# Altium PCB CAMtastic1_3.PcbDoc
Units mm, origin at the board's own origin, x right, y up, seen from the top; angles counter-clockwise.
Board outline 43 x 40.1 mm, 4 copper layers (Top Layer, Mid-Layer 1, Mid-Layer 2, Bottom Layer); 70 components, 76 nets, 333 pads, 118 vias.
Unrouted connection lines stored in the file: 8.
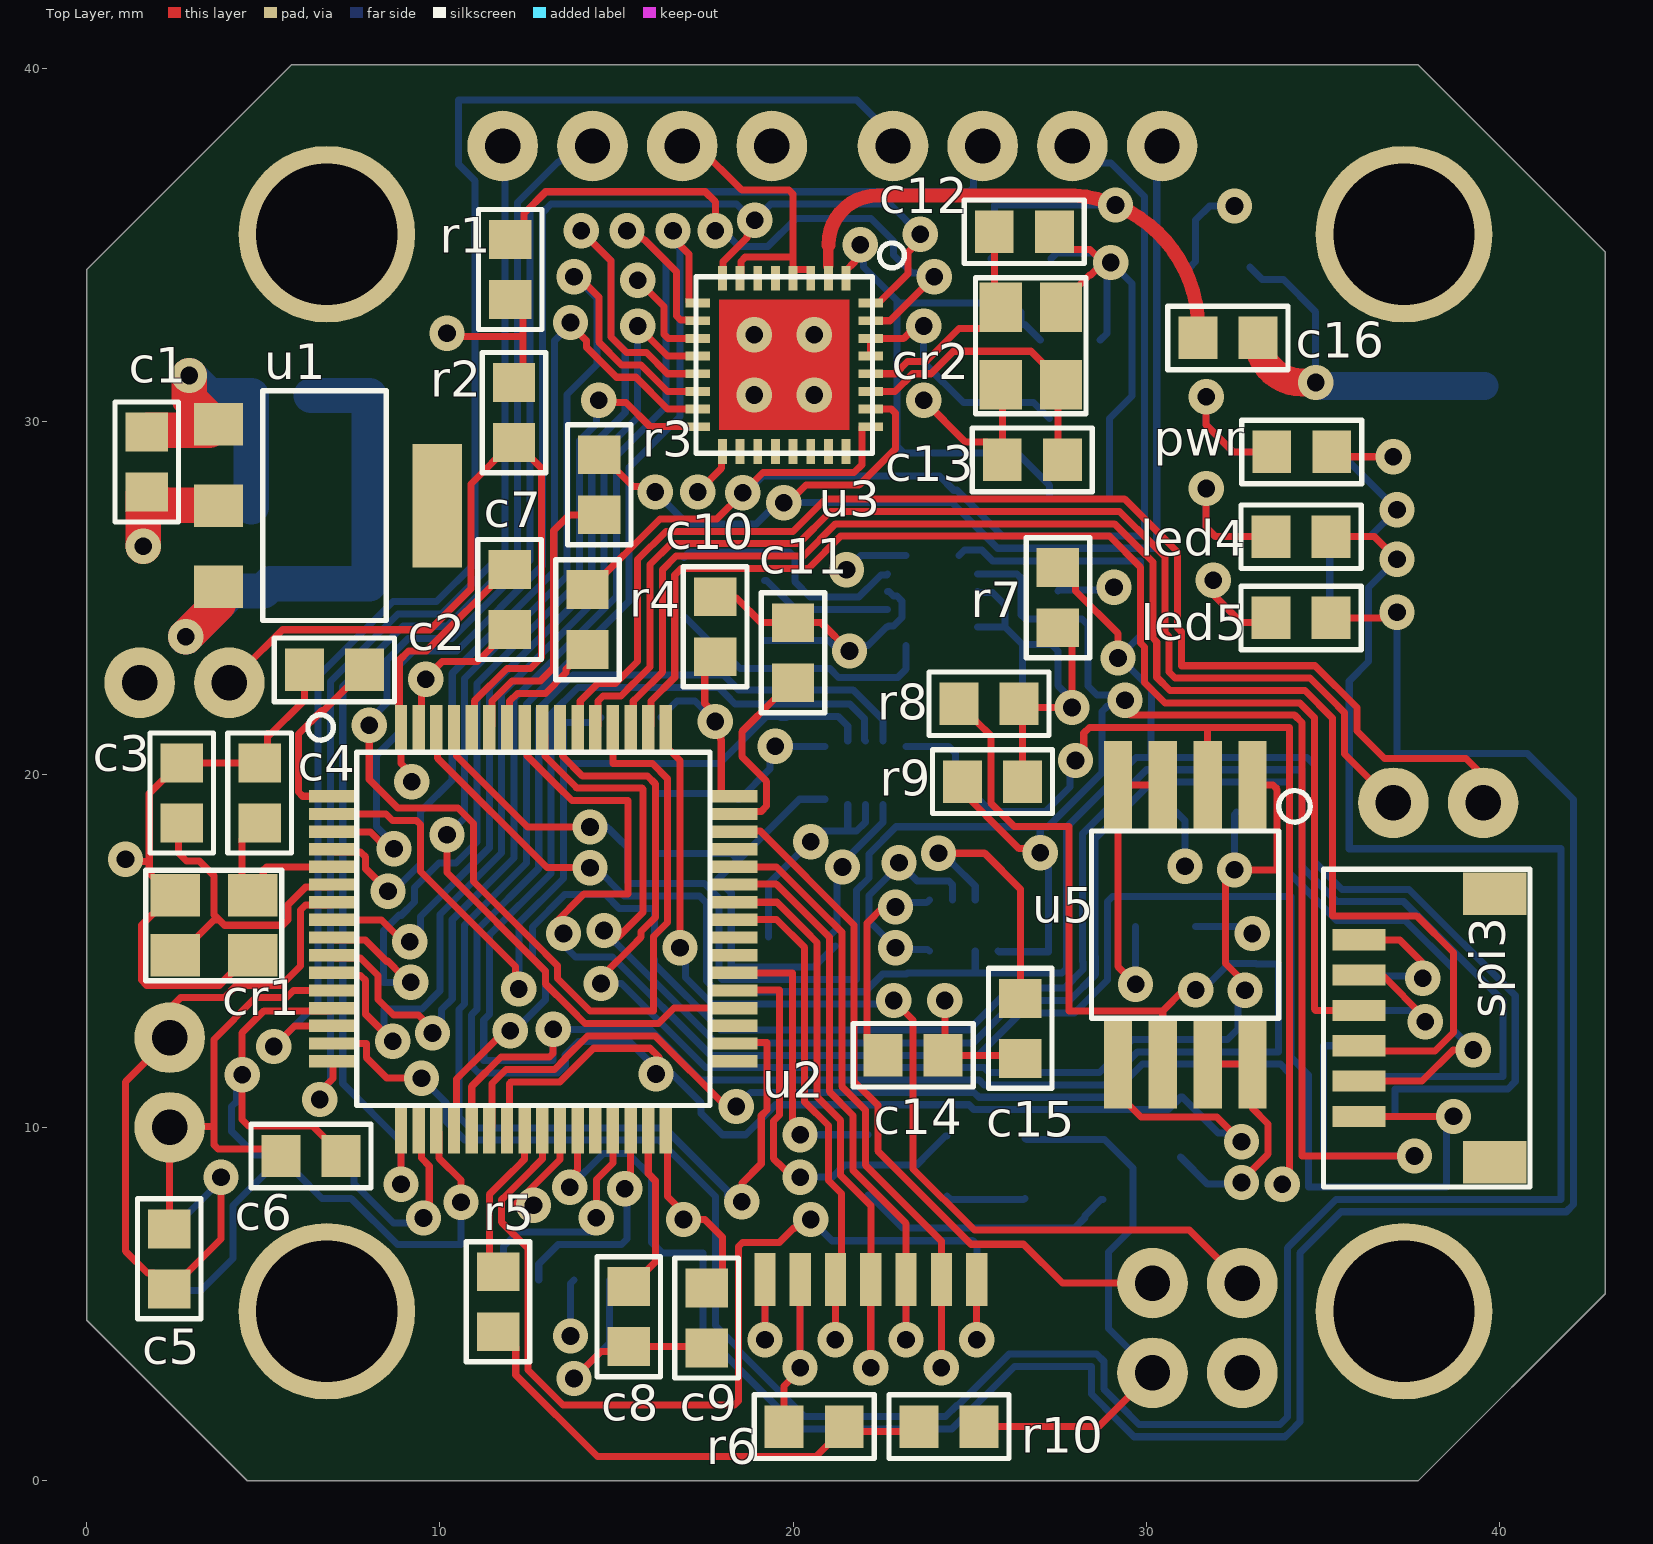
[diagram p0: Top Layer view]
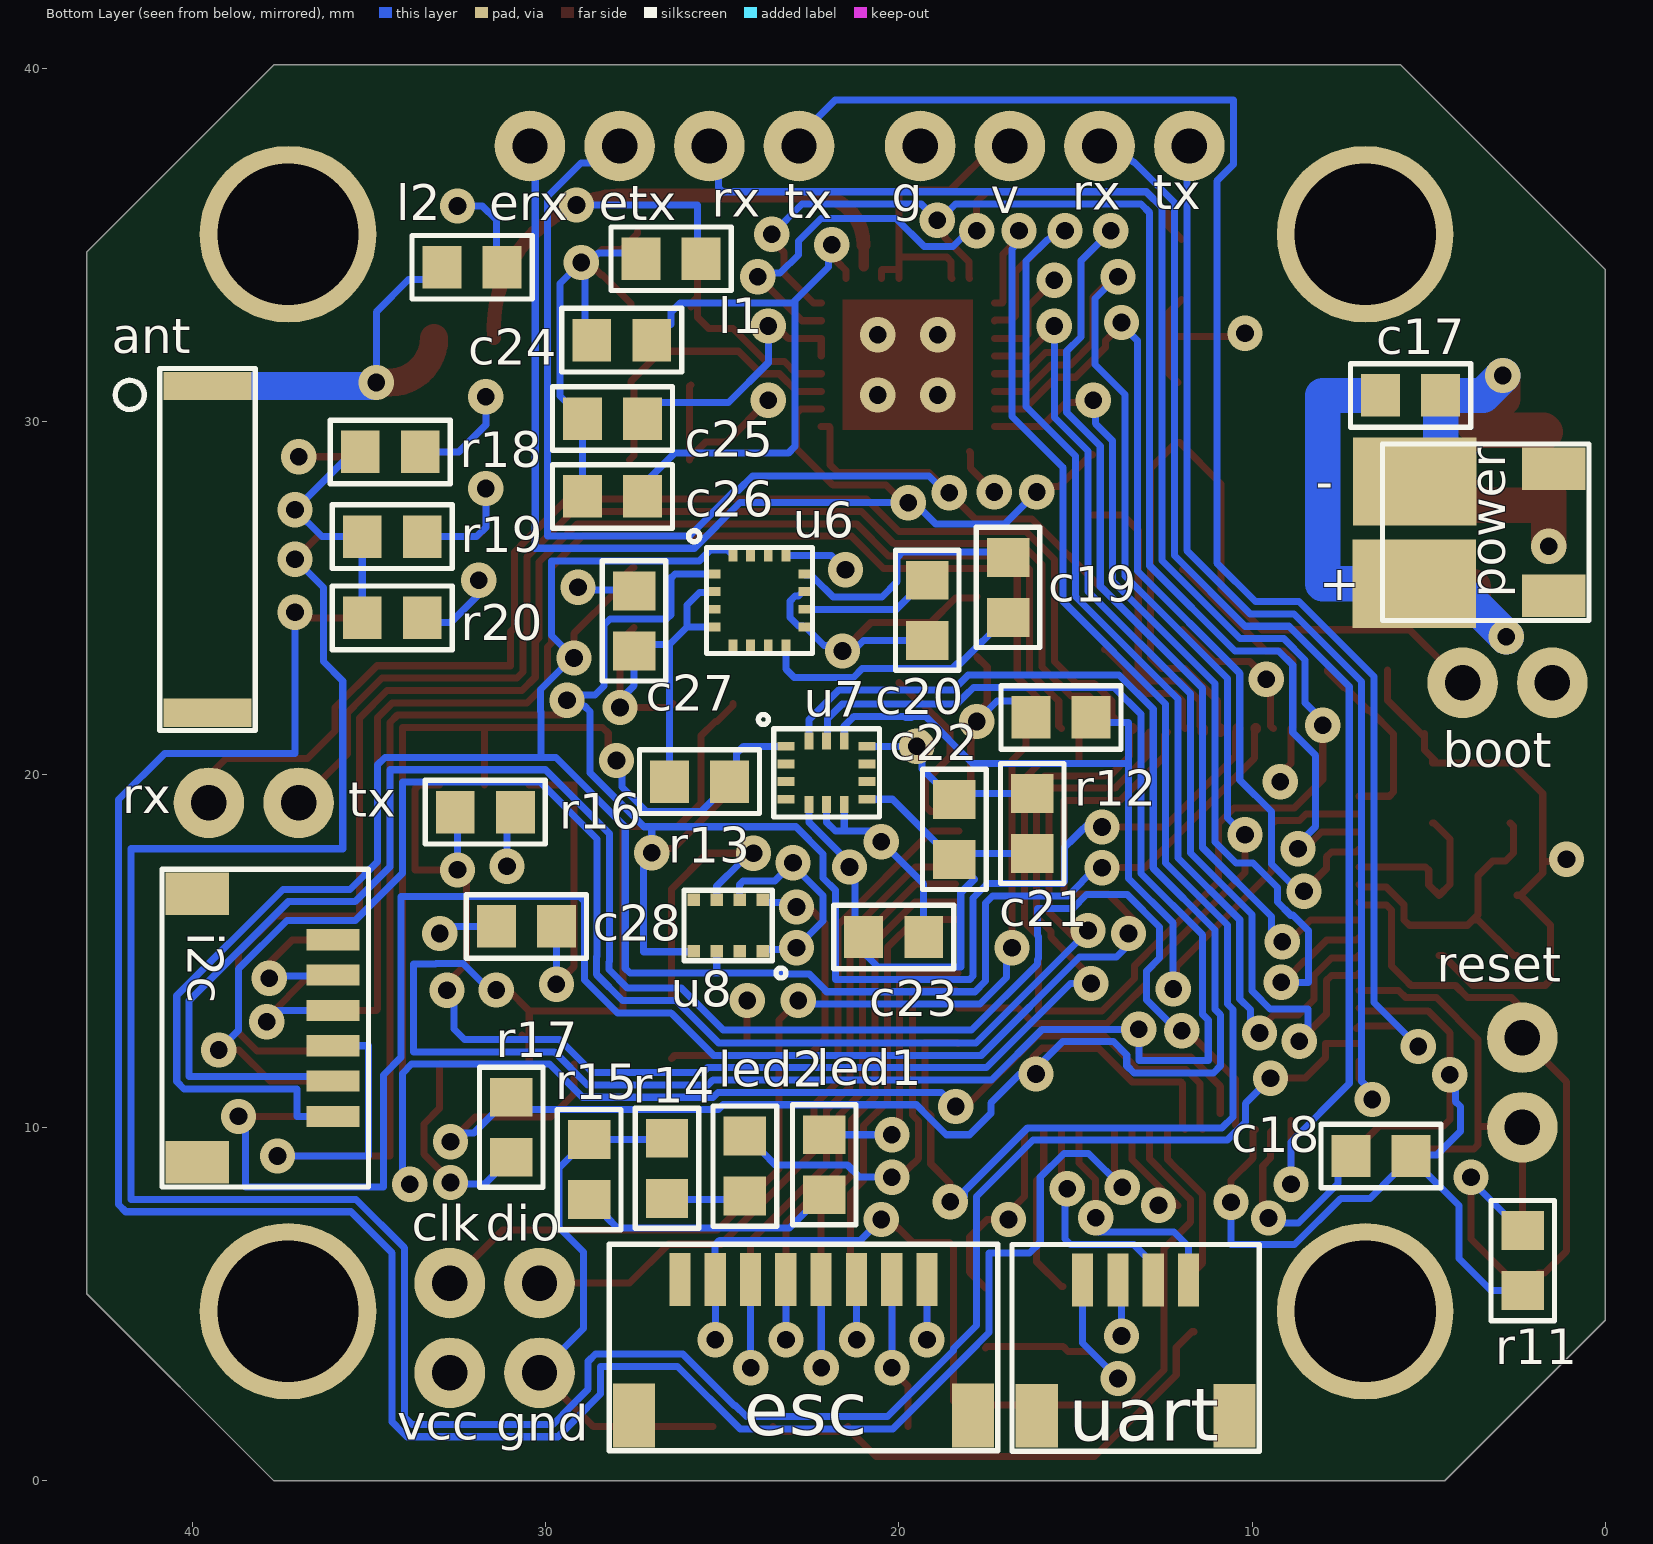
[diagram p1: Bottom Layer view, seen from below]
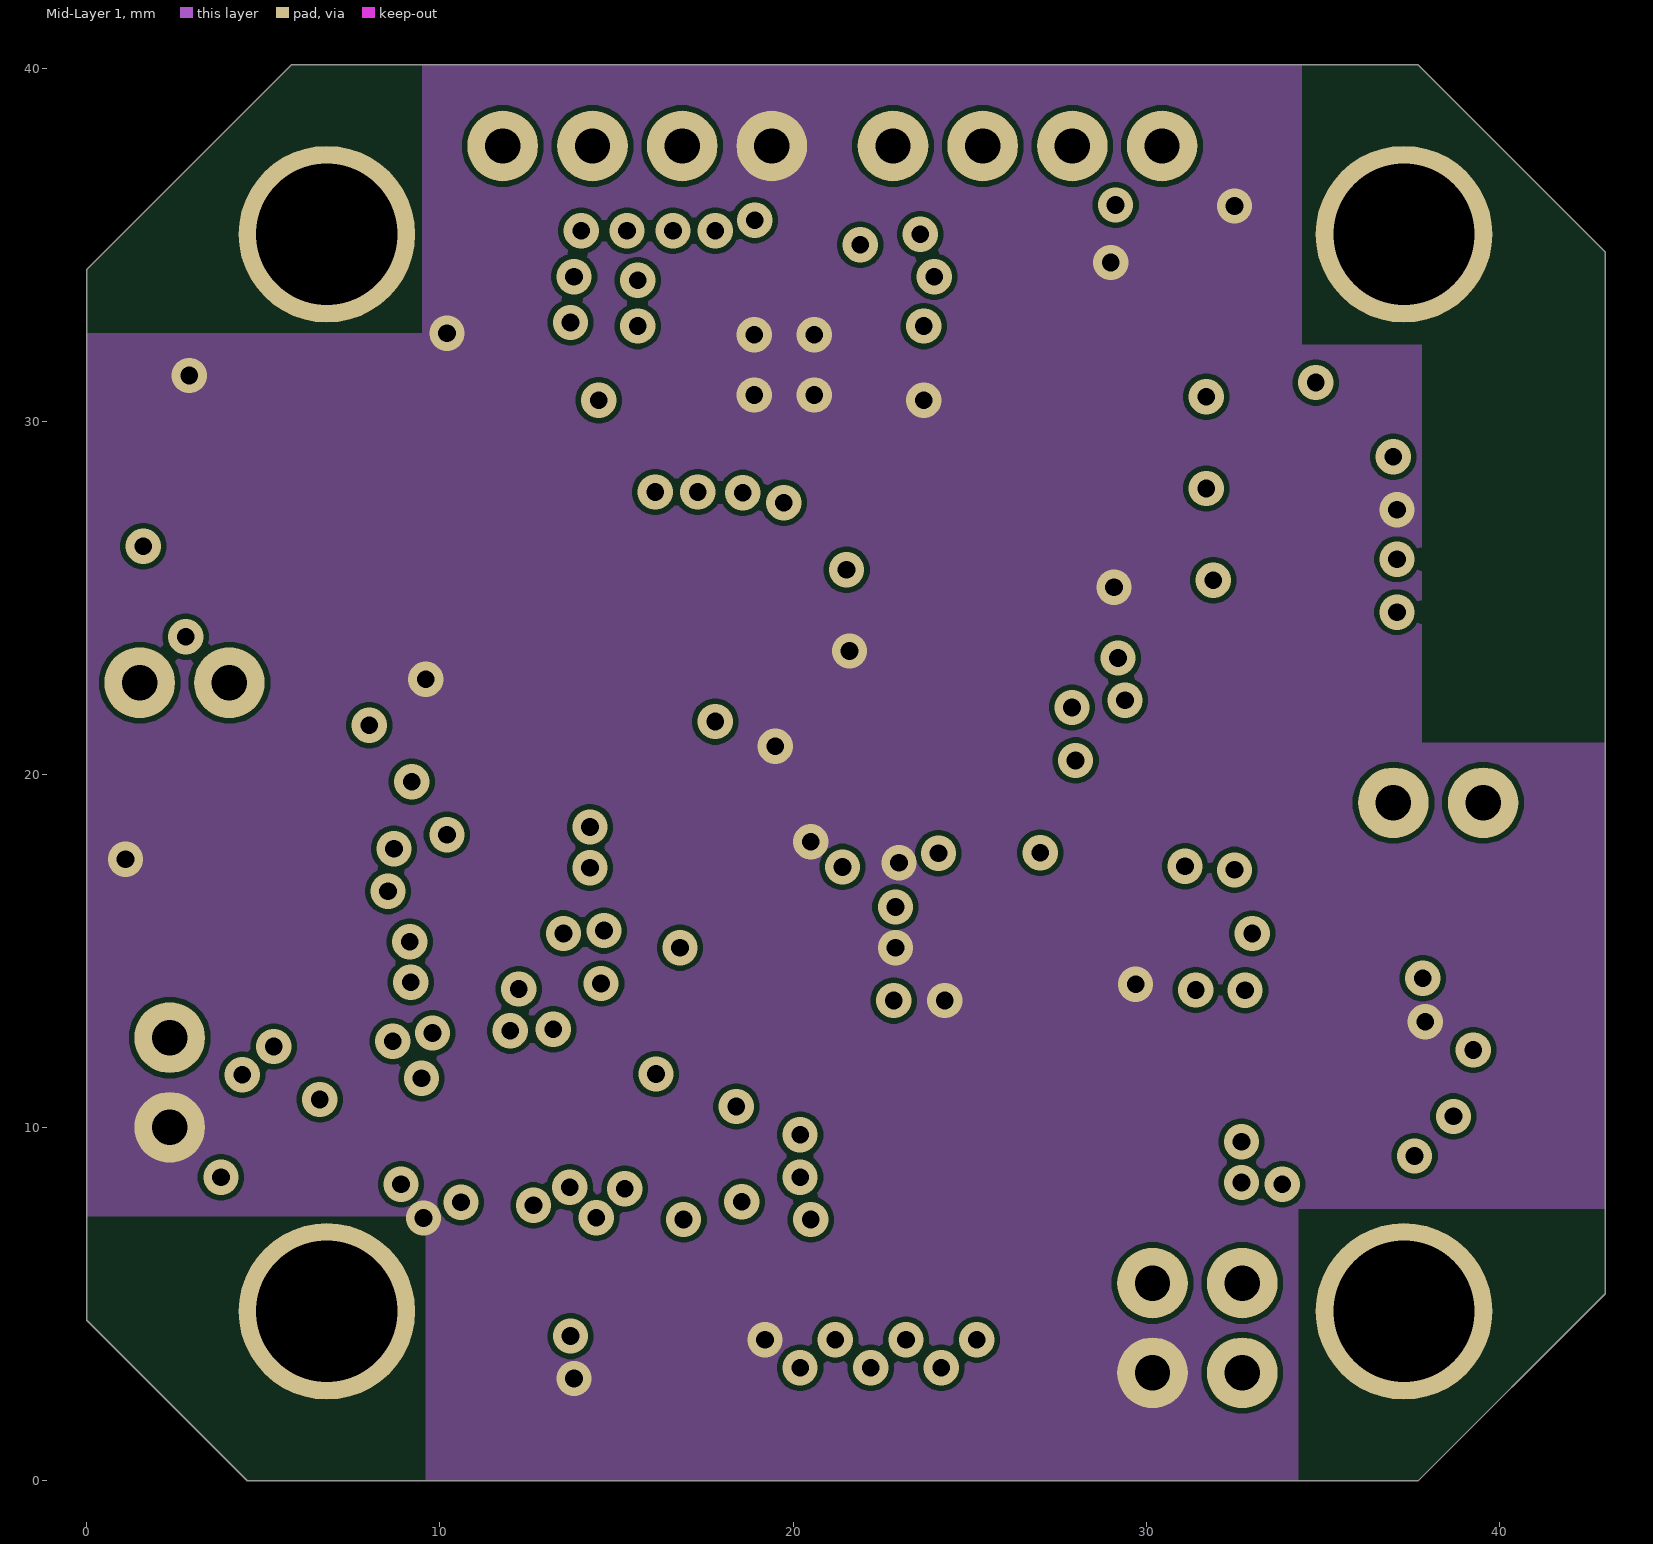
[diagram p2: Mid-Layer 1]
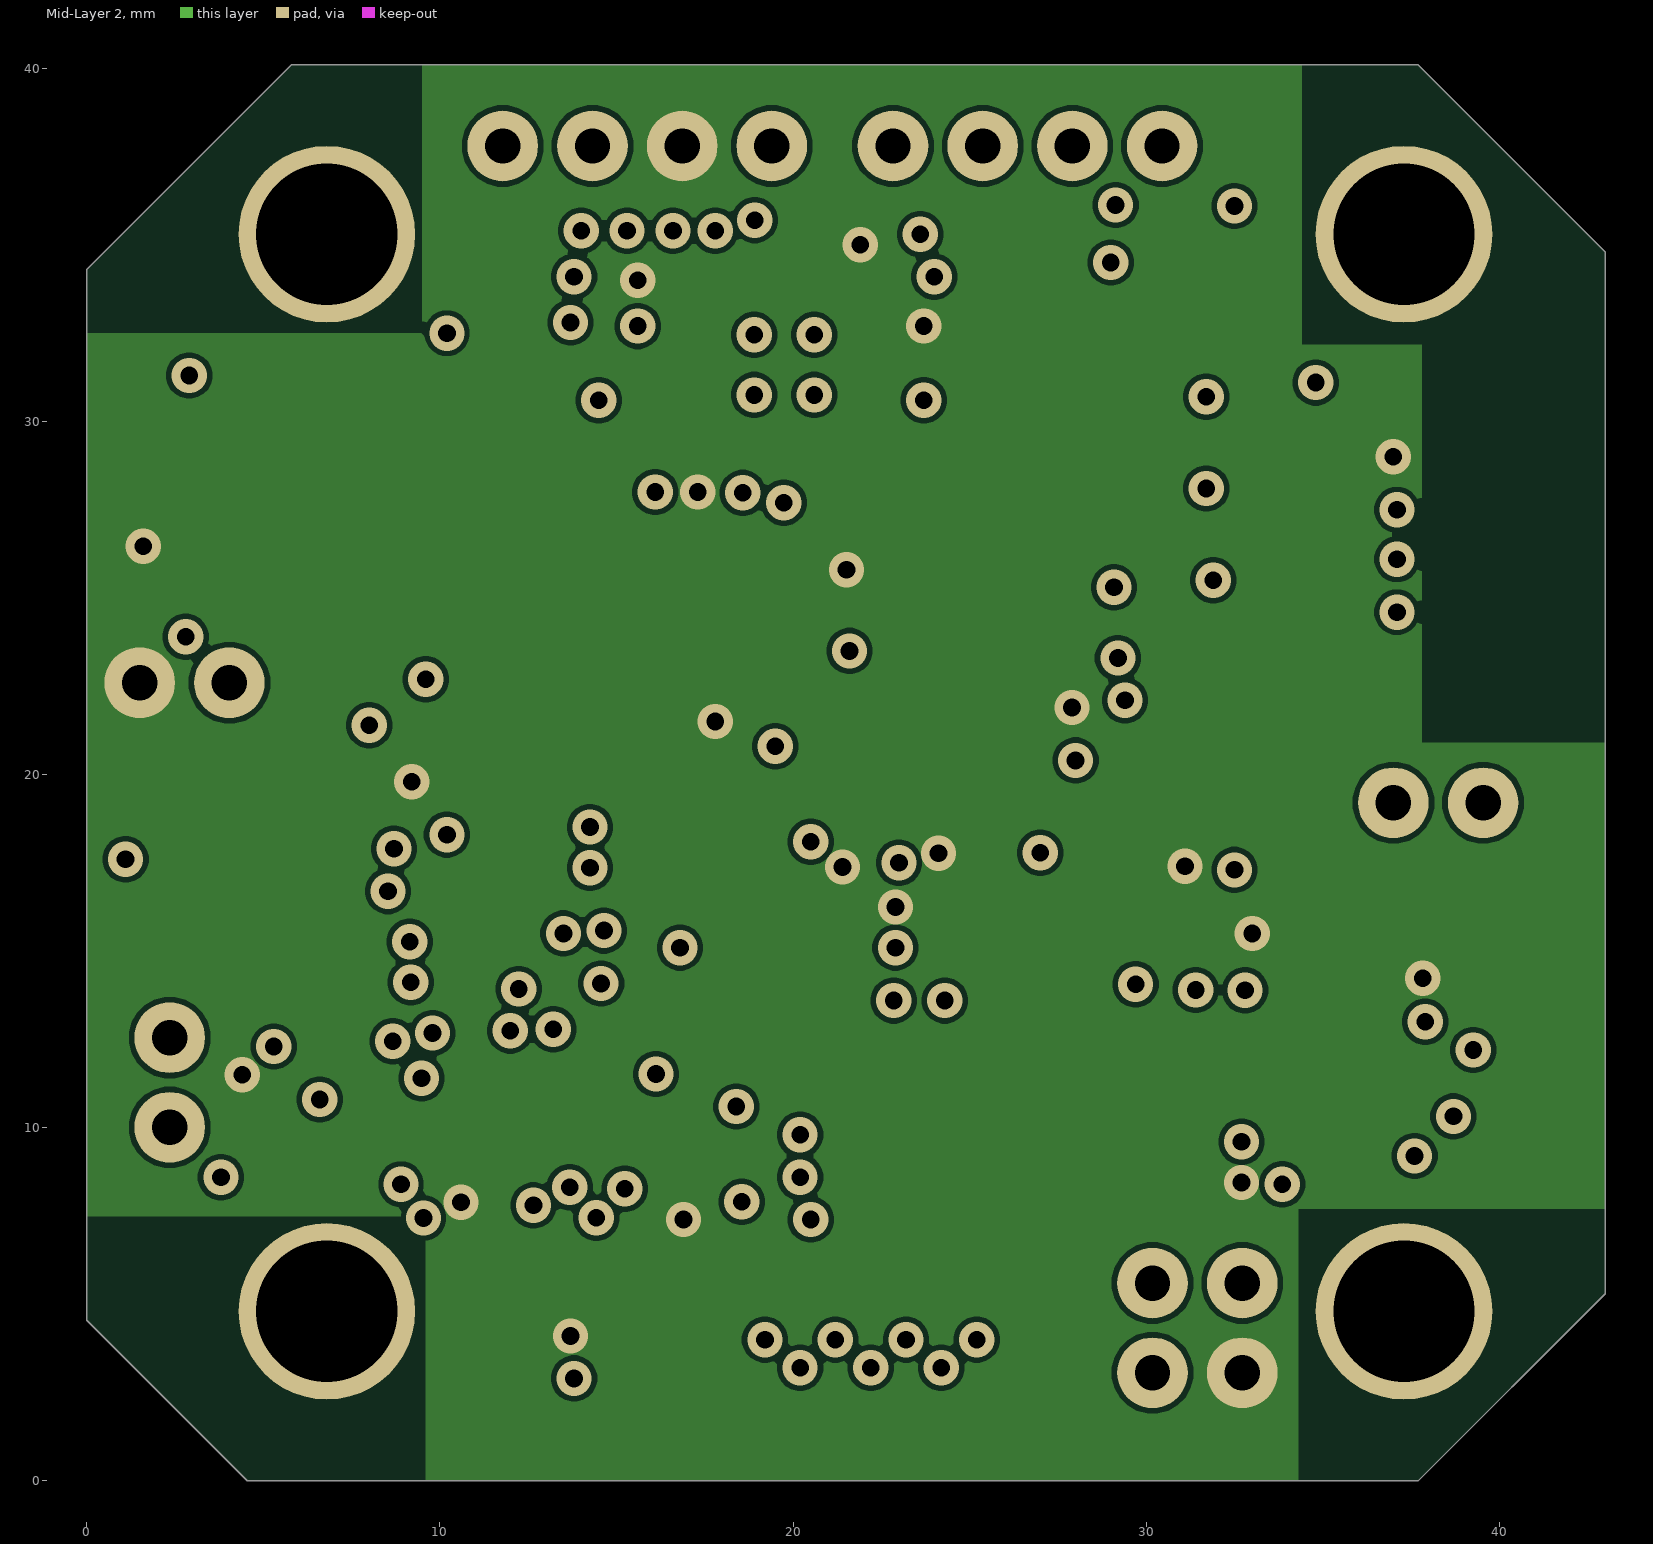
[diagram p3: Mid-Layer 2]

## Layer stack, top to bottom
Top Solder: solder mask 0.0102, Solder Resist, Dk 3.5
Top Layer: signal copper 0.0356
Dielectric 1: dielectric 0.32, FR-4, Dk 4.8
Mid-Layer 1: signal copper 0.0356
Dielectric 2: dielectric 0.32, FR-4, Dk 4.8
Mid-Layer 2: signal copper 0.0356
Dielectric 3: dielectric 0.32, FR-4, Dk 4.8
Bottom Layer: signal copper 0.0356
Bottom Solder: solder mask 0.0102, Solder Resist, Dk 3.5

## Board outline
0,4.546 4.531,0.015 4.531,0 37.699,0 43,5.301 43,34.8 37.7,40.1 5.8,40.1 0,34.3

## Design rules (kind name [scope] priority, off if disabled: settings)
Clearance [All] p1: gap=0.15 ignorepadtopadclearanceinfootprint=FALSE except(0: Arc-Hole Track-Hole SMDPad-Hole THPad-Hole Via-Hole Fill-Hole Poly-Hole Region-Hole Text-Hole)
HoleSize [All] p1: absolutevalues=TRUE maxlimit=5 minlimit=0.025 maxpercent=80.000 minpercent=20.000
MinimumSolderMaskSliver [All] p1: minsoldermaskwidth=0
PolygonConnect CAM_PolygonConnect_$Net0 [InNet('$Net0')] p1: connectstyle=Direct reliefconductorwidth=0.254 reliefentries=4 polygonreliefangle="90 Angle" airgapwidth=0.254
PolygonConnect CAM_PolygonConnect_$Net1 [InNet('$Net1')] p2: connectstyle=Direct reliefconductorwidth=0.254 reliefentries=4 polygonreliefangle="90 Angle" airgapwidth=0.254
PolygonConnect [All] p3: connectstyle=Direct reliefconductorwidth=0.254 reliefentries=4 polygonreliefangle="90 Angle" airgapwidth=0.254
RoutingVias [All] p1: holewidth=0.711 width=1.27 viastyle="Through Hole" minholewidth=0.5 minwidth=0.5 maxholewidth=3 maxwidth=4
SilkToSilkClearance [All] p1: silktosilkclearance=0
SilkToSolderMaskClearance [IsPad] p1: minsilkscreentomaskgap=0 clearancetoexposedcopper=TRUE
SolderMaskExpansion [All] p1: expansion=0.102 istentingtop=FALSE
Width [All] p1: maxlimit=5 minlimit=0.2 preferedwidth=0.254 minimp=50.000000 maximp=50.000000 favimp=50.000000
26 further rules are at their usual default settings.

## Components (designator, comment, footprint, x,y, rotation, side; value= is the part's Value field where it differs from the comment)
ant "Comment" "rainsun antenna" 39.3,26.3 r90 bottom
c1 "Comment" PCBComponent_1 1.836,28.963 r0 top
c2 "Comment" 0603 6.9,23.1 r90 top
c3 "Comment" 0603 2.826,19.593 r0 top
c4 "Comment" 0603 5.031,19.593 r0 top
c5 "Comment" 0603 2.471,6.4 r0 top
c6 "Comment" 0603 6.237,9.336 r90 top
c7 "Comment" 0603 12.11,25.072 r0 top
c8 "Comment" 0603 15.214,4.537 r180 top
c9 "Comment" 0603 17.419,4.499 r180 top
c10 "Comment" 0603 17.931,24.3 r0 top
c11 "Comment" 0603 20.136,23.563 r0 top
c12 "Comment" 0603 26.437,35.505 r90 top
c13 "Comment" 0603 26.663,29.047 r90 top
c14 "Comment" 0603 23.515,11.914 r270 top
c15 "Comment" 0603 26.3,12.7 r180 top
c16 "Comment" 0603 32.2,32.5 r90 top
c17 "Comment" 0603 5.399,30.6 r270 bottom
c18 "Comment" 0603 6.463,9.336 r90 bottom
c19 "Comment" 0603 16.774,25.413 r180 bottom
c20 "Comment" 0603 19.064,24.763 r180 bottom
c21 "Comment" 0603 16.363,18.5 r0 bottom
c22 "Comment" 0603 18.567,18.334 r0 bottom
c23 "Comment" 0603 20.263,15.536 r90 bottom
c24 "Comment" 0603 27.963,32.436 r90 bottom
c25 "Comment" 0603 28.225,30.216 r90 bottom
c26 "Comment" 0603 28.225,28.011 r90 bottom
c27 "Comment" 0603 27.364,24.463 r180 bottom
c28 "Comment" 0603 30.437,15.564 r270 bottom
cr1 "Comment" smd_crystall 3.503,15.892 r180 top
cr2 "Comment" smd_crystall 26.897,32.236 r90 top
esc "Comment" SH1.0-8 24.824,3.42 r180 bottom
i2c "Comment" SH1.0-6 38.3,13.941 r270 bottom
l1 "Comment" 0603 26.339,34.47 r270 bottom
l2 "Comment" 0603 32.2,34.5 r90 bottom
led1 "Comment" 0603 22.253,8.837 r0 bottom
led2 "Comment" 0603 24.5,8.8 r0 bottom
led4 "Comment" 0603 34.5,26.6 r270 top
led5 "Comment" 0603 34.5,24.3 r270 top
power "Comment" sh1.0-2 4,28 r90 bottom
pwr "Comment" 0603 34.518,29 r270 top
r1 "Comment" 0603 12.13,34.414 r0 top
r2 "Comment" 0603 12.236,30.363 r0 top
r3 "Comment" 0603 14.65,28.318 r0 top
r4 "Comment" 0603 14.315,24.5 r0 top
r5 "Comment" 0603 11.513,4.958 r180 top
r6 "Comment" 0603 20.486,1.671 r90 top
r7 "Comment" 0603 27.636,25.122 r0 top
r8 "Comment" 0603 25.663,21.869 r270 top
r9 "Comment" 0603 25.763,19.664 r270 top
r10 "Comment" 0603 24.531,1.4 r270 top
r11 "Comment" 0603 2.2,6.35 r180 bottom
r12 "Comment" 0603 15.3,21.482 r270 bottom
r13 "Comment" 0603 25.537,19.664 r270 bottom
r14 "Comment" 0603 26.704,8.737 r0 bottom
r15 "Comment" 0603 28.909,8.7 r0 bottom
r16 "Comment" 0603 31.6,18.8 r270 bottom
r17 "Comment" 0603 31.113,9.9 r0 bottom
r18 "Comment" 0603 34.292,29 r270 bottom
r19 "Comment" 0603 34.234,26.601 r270 bottom
r20 "Comment" 0603 34.234,24.301 r270 bottom
spi3 "Comment" SH1.0-6 38.3,11.7 r90 top
u1 "Comment" ams1117 6.137,29.3 r270 top
u2 "Comment" lqfp64 6.923,9.834 r0 top
u3 "Comment" esp8285 19.2,30.25 r270 top
u5 "Comment" w25q 31.1,16 r0 top
u6 "Comment" qmc5883l 24,24.85 r180 bottom
u7 "Comment" icm42688 22.05,20.05 r180 bottom
u8 "Comment" DPS368 25.2,15.7 r270 bottom
uart "Comment" sh1.0-4 13.16,4.382 r180 bottom

## Footprints (in the part's own frame and the unit in brackets; to place one, negate y for a bottom-side part, rotate by r counter-clockwise, add the part's x,y. Pads: shape width x height; smd on the part's side, far side on the other; paste and mask are expansions set on the pad)
0603 [mm] "0603"
  rect 1.2x1.1 smd: 1(-0.136,0.737) 1(-0.136,-0.963)
  silkscreen extent -1.04,-1.81 0.76,1.59
ams1117 [mm] "ams1117"
  rect 1.2x1.4 smd: 1(-0.615,-2.406) 1(1.685,-2.406) 1(3.985,-2.406)
  rect 3.5x1.4 smd: 1(1.685,3.794)
  silkscreen extent -1.57,-1.16 4.94,2.34
DPS368 [mm] "DPS368"
  rect 0.35x0.35 smd: 1(-0.75,-0.61) 1(-0.75,0.04) 1(-0.75,0.69) 1(-0.75,1.34) 1(0.7,-0.61) 1(0.7,0.04) 1(0.7,0.69) 1(0.7,1.34)
  silkscreen extent -1.03,-0.89 1.46,2
esp8285 [mm] "esp8285"
  rect 0.7x0.25 smd: 4(-3.8,2.3) 4(-3.8,-1.2) 4(-3.8,-0.7) 4(-3.8,-0.2) 4(-3.8,0.3) 4(-3.8,0.8) 4(-3.8,1.3) 4(-3.8,1.8) 4(1.1,1.8) 4(1.1,2.3) 4(1.1,0.8) 4(1.1,1.3) 4(1.1,-0.2) 4(1.1,0.3) 4(1.1,-1.2) 4(1.1,-0.7)
  rect 0.25x0.7 smd: 4(-3.1,3) 4(-3.1,-1.9) 4(-2.6,3) 4(-2.6,-1.9) 4(-2.1,3) 4(-2.1,-1.9) 4(-1.6,3) 4(-1.6,-1.9) 4(-1.1,3) 4(-1.1,-1.9) 4(-0.6,3) 4(-0.6,-1.9) 4(-0.1,3) 4(-0.1,-1.9) 4(0.4,3) 4(0.4,-1.9)
  Top Layer region: -3.2,-1.3 0.5,-1.3 0.5,2.4 -3.2,2.4
  silkscreen extent -4.8,-1.95 1.15,3.95
icm42688 [mm] "icm42688"
  rect 0.48x0.25 smd: 1(-1.15,-0.75) 1(-1.15,-0.25) 1(-1.15,0.25) 1(-1.15,0.75) 1(1.15,-0.75) 1(1.15,-0.25) 1(1.15,0.25) 1(1.15,0.75)
  rect 0.25x0.48 smd: 1(-0.5,-0.9) 1(-0.5,0.9) 1(0,-0.9) 1(0,0.9) 1(0.5,-0.9) 1(0.5,0.9)
  silkscreen extent -1.93,-1.25 1.5,1.65
lqfp64 [mm] "lqfp64"
  rect 1.35x0.35 smd: 1(0.052,2.051) 1(0.052,2.551) 1(0.052,3.051) 1(0.052,3.551) 1(0.052,4.051) 1(0.052,4.551) 1(0.052,5.051) 1(0.052,5.551) 1(0.052,6.051) 1(0.052,6.551) 1(0.052,7.051) 1(0.052,7.551) 1(0.052,8.051) 1(0.052,8.551) 1(0.052,9.051) 1(0.052,9.551) 1(11.402,2.051) 1(11.402,2.551) 1(11.402,3.051) 1(11.402,3.551) 1(11.402,4.051) 1(11.402,4.551) 1(11.402,5.051) 1(11.402,5.551) 1(11.402,6.051) 1(11.402,6.551) 1(11.402,7.051) 1(11.402,7.551) 1(11.402,8.051) 1(11.402,8.551) 1(11.402,9.051) 1(11.402,9.551)
  rect 0.35x1.35 smd: 1(1.977,0.116) 1(1.977,11.466) 1(2.477,0.116) 1(2.477,11.466) 1(2.977,0.116) 1(2.977,11.466) 1(3.477,0.116) 1(3.477,11.466) 1(3.977,0.116) 1(3.977,11.466) 1(4.477,0.116) 1(4.477,11.466) 1(4.977,0.116) 1(4.977,11.466) 1(5.477,0.116) 1(5.477,11.466) 1(5.977,0.116) 1(5.977,11.466) 1(6.477,0.116) 1(6.477,11.466) 1(6.977,0.116) 1(6.977,11.466) 1(7.477,0.116) 1(7.477,11.466) 1(7.977,0.116) 1(7.977,11.466) 1(8.477,0.116) 1(8.477,11.466) 1(8.977,0.116) 1(8.977,11.466) 1(9.477,0.116) 1(9.477,11.466)
  Top Layer lines w0.2: 10.877,11.666 10.877,11.566 11.077,11.366
  Top Layer lines w0.3: 2.977,11.466 2.977,11.476 ; 3.477,11.466 3.477,11.476 ; 3.977,11.376 3.977,11.466 ; 4.477,11.376 4.477,11.466 ; 6.477,11.466 6.477,11.476
  silkscreen extent -0.66,0.8 10.73,11.86
PCBComponent_1 [mm] "0603"
  rect 1.2x1.1 smd: 1(-0.136,-0.963) 1(-0.136,0.737)
  silkscreen extent -1.04,-1.81 0.76,1.59
qmc5883l [mm] "qmc5883l"
  rect 0.32x0.25 smd: 1(-1.22,-0.67) 1(-1.22,-0.17) 1(-1.22,0.33) 1(-1.22,0.83) 1(1.32,-0.67) 1(1.32,-0.17) 1(1.32,0.33) 1(1.32,0.83)
  rect 0.25x0.32 smd: 1(-0.7,-1.19) 1(-0.7,1.35) 1(-0.2,-1.19) 1(-0.2,1.35) 1(0.3,-1.19) 1(0.3,1.35) 1(0.8,-1.19) 1(0.8,1.35)
  silkscreen extent -1.96,-1.42 1.55,2.06
"rainsun antenna" [mm] "rainsun antenna"
  rect 0.8x2.5 smd: 6(-4.55,0.28) 6(4.7,0.28)
  silkscreen extent -5.05,-1.07 5.2,2.89
sh1.0-2 [mm] "sh1.0"
  rect 0.6x1.5 smd: 1(-1.64,1.31) 1(-0.64,1.31)
  rect 1.2x1.8 smd: 5(-2.94,-2.54) 5(0.66,-2.54)
  silkscreen extent -3.64,-3.54 1.36,2.31
sh1.0-4 [mm] "sh1.0"
  rect 0.6x1.5 smd: 1(-1.64,1.31) 1(-0.64,1.31) 1(0.36,1.31) 1(1.36,1.31)
  rect 1.2x1.8 smd: 5(-2.94,-2.54) 5(2.66,-2.54)
  silkscreen extent -3.64,-3.54 3.36,2.31
SH1.0-6 [mm]
  rect 0.6x1.5 smd: 1(-1.38,2.28) 1(-0.38,2.28) 1(0.62,2.28) 1(1.62,2.28) 1(2.62,2.28) 1(3.62,2.28)
  rect 1.2x1.8 smd: 5(-2.68,-1.57) 5(4.92,-1.57)
  silkscreen extent -3.38,-2.57 5.62,3.28
SH1.0-8 [mm]
  rect 0.6x1.5 smd: 1(-1.38,2.28) 1(-0.38,2.28) 1(0.62,2.28) 1(1.62,2.28) 1(2.62,2.28) 1(3.62,2.28) 1(4.62,2.28) 1(5.62,2.28)
  rect 1.2x1.8 smd: 5(-2.68,-1.57) 5(6.92,-1.57)
  silkscreen extent -3.38,-2.57 7.62,3.28
smd_crystall [mm]
  rect 1.4x1.2 smd: 3(-1.2,1.01) 3(-1.2,-0.69) 3(1,1.01) 3(1,-0.69)
  silkscreen extent -2.02,-1.4 1.83,1.73
w25q [mm] "w25q"
  rect 0.8x2.5 smd: 1(-1.9,-4.2) 1(-1.9,3.7) 1(-0.63,-4.2) 1(-0.63,3.7) 1(0.64,-4.2) 1(0.64,3.7) 1(1.91,-4.2) 1(1.91,3.7)
  silkscreen extent -2.65,-2.9 3.55,3.55

## Free pads (board coordinates)
  round 2 hole 1.001: 1(1.5,22.6) 1(2.35,10.01) 1(2.35,12.55) 1(4.04,22.6) 1(11.78,37.8) 1(14.32,37.8) 1(16.86,37.8) 1(19.4,37.8) 1(22.83,37.8) 1(25.37,37.8) 1(27.91,37.8) 1(30.18,3.06) 1(30.18,5.6) 1(30.45,37.8) 1(32.72,3.06) 1(32.72,5.6) 1(37,19.2) 1(39.54,19.2)
  round 5 hole 4: 1(6.8,4.8) 1(6.8,35.3) 1(37.3,4.8) 1(37.3,35.3)
  rect 0.6x1.5 smd: 2(19.204,5.7) 2(20.204,5.7) 2(21.202,5.698) 2(22.202,5.698) 2(23.202,5.698) 2(24.202,5.698) 2(25.202,5.698)
  rect 3.5x2.5 smd far side: 3(5.4,28.3) 3(5.41,25.4)

## Via types
v1: diameter 1, hole 0.5, Top Layer to Bottom Layer, tented both sides, 116 vias
v2: diameter 1/1/1/1 (per signal layer), hole 0.5, Top Layer to Bottom Layer, tented both sides, 2 vias

## Nets (pads, with @x,y where several pads share a name; then routed paths per layer and width w, separated by ;. In a path a pad name is that pad's centre, name@x,y a point inside that pad or via, vN(x,y) a via of type N, cw(c..) or ccw(c..) an arc to the next point about the centre after c; other vN are vias at no path point)
ant: ant.6@39.58,31 c16.1@33.163,32.364 l2.1@32.937,34.364 | length 11.6
  Top Layer w0.4: v1@34.428,31.1 v1(34.8,31.1)
  Top Layer w0.8: c16.1@33.163,32.364 ccw(c34.428,32.364) v1@34.428,31.1
  Bottom Layer w0.2: l2.1@32.937,34.364 33.287,34.014 33.887,34.014 34.8,33.101 v1(34.8,31.1)
  Bottom Layer w0.8: v1(34.8,31.1) 34.9,31 36.73,31 ant.6@39.58,31
antcap: c16.1@31.463,32.364 l1.1@25.602,34.605 u3.4@21,34.05 | length 19.3
  Top Layer w0.3: 21,34.4 21,35
  Top Layer w0.4: 21,35 cw(c22.4,35) 22.4,36.4 27.977,36.4 cw(c27.703,32.639) c16.1@31.463,32.364
  Bottom Layer w0.2: l1.1@25.602,34.605 25.7,34.703 25.7,34.719 25.7,36.128 v1(29.133,36.128)
boot: pad.1@4.04,22.6 r2.1@12.1,29.4 u2.1@10.9,21.3 | length 22.2
  Top Layer w0.2: pad.1@4.04,23 4.44,23 5.54,24.1 9.721,24.1 10.881,25.26 10.881,28.231 12.05,29.4 12.15,29.4 12.875,28.675 12.875,23.31 12.565,23 11.896,23 10.975,22.079 10.975,21.992 10.975,21.375 10.9,21.3 u2.1@10.9,21.21
ch1: esc.1@21.204,5.7 pad.2@21.202,5.698 u2.1@18.325,15.885 | length 15.7
  Top Layer w0.2: u2.1@18.3,15.9 19.534,15.9 20.331,15.103 20.331,14.53 20.331,10.73 21,10.061 21,8.504 21.369,8.135 21.369,5.865 21.2,5.696 v1(21.2,4)
  Bottom Layer w0.2: v1(21.2,4) 21.2,5.696 esc.1@21.204,5.7
ch2: esc.1@22.204,5.7 pad.2@22.202,5.698 u2.1@18.325,16.385 | length 17.9
  Top Layer w0.2: u2.1@18.325,16.385 19.544,16.385 20.331,15.598 20.681,15.248 20.681,10.875 21.35,10.206 21.35,8.649 22.202,7.796 pad.2@22.202,5.698 ; v1(22.2,3.2) pad.2@22.2,5.609
  Bottom Layer w0.2: v1(22.2,3.2) esc.1@22.2,5.696
ch3: esc.1@23.204,5.7 pad.2@23.202,5.698 u2.1@18.325,16.885 | length 17.2
  Top Layer w0.2: u2.1@18.4,16.9 19.524,16.9 20.932,15.492 21.031,15.393 21.031,11.02 21.7,10.351 21.7,8.794 23.2,7.294 pad.2@23.2,5.696 ; v1(23.2,4) pad.2@23.2,5.696 ; pad.2@23.202,5.698 pad.2@23.2,5.696
  Bottom Layer w0.2: v1(23.2,4) esc.1@23.2,5.696
ch4: esc.1@24.204,5.7 pad.2@24.202,5.698 u2.1@18.325,17.385 | length 19.8
  Top Layer w0.2: u2.1@18.325,17.385 19.534,17.385 20.681,16.238 21.381,15.538 21.381,11.165 22.05,10.496 22.05,8.939 24.202,6.787 pad.2@24.202,5.698 ; v1(24.2,3.2) pad.2@24.2,5.696
  Bottom Layer w0.2: v1(24.2,3.2) esc.1@24.2,5.696
ch5: spi3.1@36.02,10.32 u2.1@12.4,21.3 | length 52.1
  Top Layer w0.2: u2.1@12.4,21.2 12.475,21.125 12.475,20.608 12.475,20.521 13.383,19.613 13.388,19.613 13.651,19.35 13.657,19.35 13.743,19.263 15.327,19.263 15.327,16.613 14.561,16.613 14.076,16.613 13.231,15.769 v1(13.499,15.501) ; spi3.1@36.02,10.32 v1(38.7,10.32)
  Bottom Layer w0.2: v1(13.499,15.501) 13.499,15.179 13.845,14.833 14.335,14.833 14.887,14.833 17.67,12.05 25.25,12.05 26.45,13.25 27.972,13.25 28.909,14.187 28.909,14.987 28.9,14.996 28.9,16.404 29.046,16.55 34.1,16.55 34.1,11.995 34.599,11.496 34.599,8.708 34.599,8.32 38.5,8.32 38.5,10.12 v1(38.7,10.32)
ch6: spi3.1@36.02,11.32 u2.1@12.9,21.3 | length 49.5
  Top Layer w0.2: u2.1@12.9,21.2 12.975,21.125 12.975,20.608 12.975,20.521 13.796,19.7 13.801,19.7 13.888,19.613 15.729,19.613 15.75,19.593 15.75,16.101 15.049,15.4 14.756,15.693 v1(14.646,15.583) ; spi3.1@36.02,11.32 37.815,11.32 38.695,12.2 v1(39.259,12.2)
  Bottom Layer w0.2: v1(14.646,15.583) 14.7,15.583 14.7,15.515 17.815,12.4 25.105,12.4 26.305,13.6 27.827,13.6 28.559,14.332 28.559,14.842 28.55,14.851 28.55,18.179 30.157,19.786 34.06,19.786 34.06,17.206 35.395,15.871 36.874,15.871 37.329,15.871 38.7,14.5 38.7,12.759 v1(39.259,12.2)
clk: pad.1@32.72,5.6 u2.1@16.4,21.3 | length 29.2
  Top Layer w0.2: u2.1@16.4,21.3 16.4,20.8 16.475,20.725 16.478,20.725 16.8,20.403 v1(16.8,15.1) ; v1(22.85,13.6) 23.401,13.049 23.401,8.833 25.135,7.1 28.753,7.1 31.22,7.1 pad.1@32.72,5.6
  Bottom Layer w0.2: v1(16.8,15.1) 16.953,14.947 16.953,14.252 17.705,13.5 22.6,13.5 22.7,13.6 v1(22.85,13.6)
cs1: r12.1@14.563,21.618 u2.1@6.975,18.885 u7.1@21.55,20.95 | length 26.8
  Top Layer w0.2: u2.1@6.975,18.885 8.476,18.885 8.661,18.7 9.333,18.7 9.45,18.583 9.45,17.25 12.137,14.563 12.137,14.026 v1(12.235,13.929)
  Bottom Layer w0.2: v1(12.235,13.929) 12.235,15.793 13.5,17.058 13.5,17.764 13.5,20.313 ; r12.1@14.563,21.618 14.418,21.472 13.5,21.472 13.5,20.75 13.5,20.313 ; u7.1@21.55,20.95 21.55,21.373 21.273,21.65 19.85,21.65 19.813,21.613 19.647,21.613 19.611,21.65 19.25,21.65 17.913,20.313 13.5,20.313
cs2: r16.1@32.563,18.936 u2.1@13.4,21.3 u5.1@33.01,19.7 | length 40.7
  Top Layer w0.2: u2.1@13.4,21.31 13.4,21.3 13.475,21.225 13.475,20.608 13.475,20.521 14.033,19.963 14.755,19.963 15.874,19.963 16.1,19.738 16.1,15.956 15.7,15.556 15.7,15.395 15.394,15.089 14.741,14.436 14.741,14.259 v1(14.564,14.083) ; v1(32.8,13.895) 32.8,14.1 32.25,14.65 32.25,17.05 v1(32.5,17.3) 32.713,17.3 33.71,17.3 33.71,19.583 33.593,19.7 u5.1@33.01,19.7
  Bottom Layer w0.2: v1(14.564,14.083) 15.142,14.083 17.525,11.7 24.338,11.7 25.416,11.7 25.553,11.563 28.673,11.563 29.61,12.5 29.7,12.5 32.3,12.5 32.6,12.8 32.6,13.9 32.697,13.997 v1(32.8,13.895) ; v1(32.5,17.3) 32.5,18.872 r16.1@32.563,18.936
cs4: u2.1@6.975,15.885 u3.4@17.3,31.35 | length 32
  Top Layer w0.2: u2.1@6.975,15.885 8.346,15.885 8.9,15.331 9.085,15.331 v1(9.15,15.266) ; v1(14,35.4) 14.85,34.55 14.85,32.389 15.289,31.95 15.85,31.95 16.45,31.35 u3.4@17.3,31.35
  Bottom Layer w0.2: v1(9.15,15.266) 9.15,15.58 9.45,15.58 9.45,15.978 11.4,17.928 11.4,18.423 11.4,22.433 14.3,25.333 14.3,29.307 15.25,30.257 15.25,31.989 14.85,32.389 14.85,34.55 v1(14,35.4)
current: esc.1@25.204,5.7 pad.2@25.202,5.698 u2.1@12.9,9.95 | length 30.4
  Top Layer w0.2: u2.1@12.9,9.95 12.9,9.111 12.339,8.55 11.9,8.111 11.75,7.961 11.75,7.324 12.499,6.575 12.499,4.613 12.499,3.917 12.499,3.141 13.489,2.15 18.337,2.15 18.454,2.267 18.454,6.633 18.571,6.75 19.611,6.75 20.015,7.154 20.038,7.154 20.284,7.4 v1(20.5,7.4) v1@20.796,7.4 ; v1(25.2,4) 25.2,5.696 pad.2@25.202,5.698
  Bottom Layer w0.2: v1(20.5,7.4) 21.102,6.798 25.087,6.798 25.204,6.681 esc.1@25.204,5.7 ; v1(25.2,4) esc.1@25.2,5.7
dio: pad.1@30.18,5.6 u2.1@18.325,18.385 | length 20.5
  Top Layer w0.2: u2.1@18.3,18.4 18.985,18.4 19.071,18.4 21.731,15.741 21.731,11.31 22.4,10.641 22.4,9.34 25.039,6.701 26.526,6.701 27.627,5.6 29.758,5.6 pad.1@30.18,5.6
esp_rx: pad.1@30.45,37.8 r3.1@14.514,29.055 u3.4@22.2,30.35 | length 34.7
  Top Layer w0.2: r3.1@14.514,29.055 14.564,29.055 15.466,28.153 15.947,28.153 v1(16.1,28) ; v1(19.736,27.7) 19.868,27.7 20.368,28.2 21.874,28.2 22.9,29.226 22.9,30.233 22.783,30.35 u3.4@22.2,30.35
  Bottom Layer w0.2: v1(16.1,28) 17,27.1 18.969,27.1 19.569,27.7 24.5,27.7 25.791,26.409 30.3,26.409 30.3,29.149 30.3,34.19 30.3,34.482 30.3,37 29.975,37.325 pad.1@30.45,37.8
esp_tx: pad.1@27.91,37.8 r4.1@14.179,25.237 u3.4@22.2,29.85 | length 35.9
  Top Layer w0.2: r4.1@14.179,25.237 14.229,25.237 16.229,27.237 17.84,27.237 v1(18.579,27.975) 19.154,28.55 21.729,28.55 21.95,28.771 21.95,29.825 21.975,29.85 u3.4@22.2,29.85
  Bottom Layer w0.2: v1(18.579,27.975) 18.672,27.975 19.147,28.45 24.15,28.45 24.55,28.05 24.645,28.05 25.936,26.759 29.95,26.759 29.95,34.045 29.95,36.372 29.444,36.878 29.383,36.938 29.007,37.314 27.81,37.314 pad.1@27.81,38.219
espboot: u2.1@6.975,17.885 u3.4@17.3,30.35 | length 25.3
  Top Layer w0.2: u2.1@6.975,17.885 7.05,17.81 7.754,17.81 7.9,17.664 7.9,17.331 v1(8.531,16.7) ; v1(13.7,32.8) 13.7,32.734 14.15,32.284 14.15,32.099 14.999,31.25 15.55,31.25 16.45,30.35 u3.4@17.3,30.35
  Bottom Layer w0.2: v1(8.531,16.7) 8.684,16.7 9.45,17.466 9.45,18.95 10.35,19.85 10.35,22.389 10.35,22.868 13.25,25.768 13.25,32.284 13.7,32.734 v1(13.7,32.8)
ext_rstb: u2.1@6.975,18.385 u3.4@18,34.05 u3.4@22.2,33.35 | length 39
  Top Layer w0.2: u2.1@6.989,18.371 8.04,18.371 8.511,17.9 v1(8.7,17.9) ; u3.4@18,34.05 18.023,34.073 18.023,34.526 18.691,35.194 18.691,35.258 18.916,35.484 v1(18.916,35.7) ; u3.4@22.2,33.35 22.425,33.35 23.25,34.175 23.25,34.783 23.6,35.133 v1(23.6,35.3)
  Bottom Layer w0.2: v1(8.7,17.9) 8.7,18.031 8.2,18.531 8.2,20.539 8.85,21.189 8.85,23.101 9.249,23.5 10.487,23.5 12.9,25.913 12.9,35.91 13.143,36.153 18.404,36.153 18.857,35.7 v1(18.916,35.7) 19.37,36.153 22.747,36.153 v1(23.6,35.3)
exti1: u2.1@6.975,15.385 u3.4@17.3,29.85 | length 26.1
  Top Layer w0.2: u2.1@6.975,15.385 7.05,15.31 7.667,15.31 7.89,15.31 8.487,14.713 8.526,14.713 8.926,14.313 9.179,14.313 v1(9.179,14.117) ; v1(14.5,30.6) 14.561,30.539 15.269,30.539 15.957,29.85 u3.4@17.3,29.85
  Bottom Layer w0.2: v1(9.179,14.117) 8.4,14.117 8.4,15.577 8.839,16.016 8.908,16.016 9.281,16.389 9.281,16.803 9.978,17.5 10.461,17.5 11.05,18.089 11.05,18.621 11.05,22.578 13.95,25.478 13.95,29.452 14.433,29.935 14.433,30.533 v1(14.5,30.6)
gnd: c1.1@1.7,29.7 c2.1@6.163,22.964 c3.1@2.691,20.329 c4.1@4.896,20.329 c5.1@2.336,7.137 c6.1@5.5,9.2 c7.1@11.975,24.109 c8.1@15.35,3.8 c9.1@17.554,3.763 c10.1@17.796,25.037 c11.1@20,24.3 c12.1@27.4,35.37 c13.1@25.926,28.911 c14.1@24.251,12.05 c15.1@26.436,11.963 c17.1@4.662,30.736 c18.1@7.2,9.2 c20.1@19.2,23.8 c21.1@16.227,19.463 c22.1@18.431,19.298 c23.1@19.3,15.4 c24.1@28.7,32.3 c25.1@28.961,30.08 c26.1@28.961,27.876 c27.1@27.5,25.2 c28.1@29.7,15.7 cr1.3@2.503,16.582 cr1.3@4.703,14.882 cr2.3@25.887,31.036 cr2.3@27.587,33.236 esc.1@19.204,5.7 i2c.1@36.02,13.321 l1.1@27.302,34.605 l2.1@31.237,34.364 pad.1@2.35,10.01 pad.1@19.4,37.8 pad.1@30.18,3.06 pad.2@19.204,5.7 pad.3@5.4,28.3 power.1@5.31,27.36 r1.1@11.994,33.45 r2.1@12.1,31.1 r10.1@25.268,1.536 r14.1@26.569,9.7 r15.1@28.773,9.663 r18.1@35.255,29.136 r19.1@35.198,26.737 r20.1@35.198,24.437 spi3.1@36.02,14.32 u1.1@3.731,29.915 u2.1@6.975,13.885 u2.1@9.4,9.95 u2.1@9.4,21.3 u5.1@29.2,19.7 u5.1@30.47,19.7 u6.1@22.68,24.18 u6.1@22.68,25.18 u7.1@20.9,20.8 u7.1@21.55,19.15 u7.1@22.05,19.15 u8.1@23.86,15 u8.1@24.51,16.45 uart.1@14.8,5.692 | length 157.4
  Top Layer w0.2: v2(1.1,17.6) 1.166,17.534 1.766,17.534 1.77,17.53 ; c5.1@2.336,7.137 2.35,7.151 2.35,10.01 2.376,10.036 3.55,10.036 ; cr1.3@2.503,16.582 cr1.3@2.403,16.582 ; c3.1@2.691,20.329 2.641,20.329 1.77,19.459 1.77,17.53 ; c3.1@2.703,20.329 4.896,20.329 c4.1@4.896,20.471 ; cr1.3@4.703,14.882 4.603,14.882 3.753,14.032 1.699,14.032 1.553,14.179 1.553,15.732 cr1.3@2.403,16.582 ; c4.1@4.825,20.4 c4.1@4.896,20.471 ; 5.122,21.161 5.122,21.062 ; c6.1@5.5,9.2 5.3,9.4 3.717,9.4 3.6,9.517 3.6,12.5 4.782,13.682 5.651,13.682 5.854,13.885 u2.1@6.975,13.885 ; c2.1@6.163,22.964 6.163,22.103 5.122,21.062 ; u2.1@9.4,9.95 9.475,9.875 9.475,9.141 9.7,8.916 9.7,7.7 9.49,7.49 v1(9.537,7.442) ; u2.1@9.4,21.3 9.475,21.375 9.475,22.575 v1(9.6,22.7) 9.6,22.734 10.066,23.2 11.066,23.2 c7.1@11.975,24.109 ; v1(10.2,32.5) 10.3,32.4 12.35,32.4 ; r1.1@11.994,33.45 12.35,33.095 12.35,32.4 ; r2.1@12.1,31.1 12.35,31.35 12.35,32.4 ; v1(13.8,2.9) 14.567,3.667 15.217,3.667 15.35,3.8 17.517,3.8 c9.1@17.554,3.763 ; c10.1@17.796,25.037 17.832,25 18.4,25 19.1,24.3 20,24.3 20.8,24.3 v1(21.6,23.5) ; v1(19.204,4) pad.2@19.204,5.7 ; v1(23.7,30.6) 24.889,29.411 25.476,29.411 c13.1@25.926,28.961 ; c14.1@24.251,12.05 26.349,12.05 c15.1@26.436,11.963 ; c14.1@24.3,12.466 v1(24.3,13.6) ; r10.1@25.268,1.536 28.656,1.536 30.18,3.06 pad.1@29.89,3.06 ; cr2.3@25.887,31.036 25.926,30.996 c13.1@25.926,28.961 ; c13.1@25.926,28.911 c13.1@25.926,28.961 ; c12.1@27.4,35.37 27.4,35.32 27.85,34.87 28.414,34.87 v1@28.784,34.5 ; cr2.3@27.587,33.236 27.587,33.336 28.398,34.147 28.43,34.147 v1@28.784,34.5 ; v1(29,34.5) v1@28.784,34.5 ; v1(29.7,14.06) 29.2,14.56 29.2,19.7 u5.1@30.47,19.7 ; spi3.1@36.02,14.32 36.688,14.32 37.9,13.108 v1(37.9,13) ; 1.77,17.53 1.77,17.215 cr1.3@2.403,16.582 ; c4.1@4.896,20.471 5.122,20.697 5.122,21.062
  Top Layer w1: c1.1@1.7,29.7 1.75,29.75 3.466,29.75 3.531,29.815 3.631,29.815 3.731,29.915 3.631,29.915 2.9,30.646 v1(2.9,31.3)
  Bottom Layer w0.2: c18.1@7.2,9.2 7.567,8.833 7.567,8.417 8.684,7.3 9.3,7.3 9.442,7.442 v1(9.537,7.442) ; v1(13.8,2.9) 14.8,3.9 uart.1@14.8,5.692 ; c21.1@16.227,19.463 18.266,19.463 18.431,19.298 18.481,19.298 19.347,20.163 19.347,20.647 v1(19.5,20.8) u7.1@20.9,20.8 ; c20.1@19.2,23.8 21,23.8 21.147,23.653 21.447,23.653 v1(21.6,23.5) 21.753,23.653 22.118,23.653 22.645,24.18 22.68,24.18 22.705,24.205 22.844,24.205 23.09,24.451 23.09,24.909 22.944,25.055 22.84,25.055 22.715,25.18 u6.1@22.68,25.18 ; v1(19.204,4) esc.1@19.204,5.7 ; c23.1@19.3,15.4 19.3,16.9 v1(20.5,18.1) 20.8,18.4 21.55,18.4 ; u7.1@21.55,19.15 21.55,18.4 ; u7.1@22.047,19.147 22.047,18.647 21.8,18.4 21.55,18.4 ; u8.1@23.86,15 23.81,15.05 23.085,15.05 23.018,14.982 v1(22.9,15.1) 22.15,15.85 22.15,16.578 23,17.428 v1(23,17.5) 23.517,16.983 24.417,16.983 24.51,16.89 u8.1@24.51,16.45 ; r14.1@26.569,9.7 26.605,9.663 28.773,9.663 28.823,9.663 29.623,8.863 29.623,7.177 28.93,6.484 28.93,4.31 pad.1@30.18,3.06 ; l1.1@27.302,34.605 27.467,34.77 28.514,34.77 28.784,34.5 v1(29,34.5) 28.887,34.387 28.887,32.487 c24.1@28.7,32.3 ; c27.1@27.5,25.2 27.522,25.222 28.822,25.222 28.994,25.394 v1(29.088,25.3) ; c26.1@28.961,27.876 28.961,30.08 29.6,30.719 29.6,33.9 v1@29.023,34.477 ; v1(29.7,14.06) c28.1@29.7,15.7 ; l2.1@31.237,34.364 31.4,34.528 31.4,35.7 31.8,36.1 v1(32.5,36.1) ; r20.1@35.198,24.437 35.198,26.737 36.337,26.737 v1(37.1,27.5) 35.564,29.036 35.355,29.036 r18.1@35.255,29.136 ; i2c.1@36.02,13.321 37.579,13.321 v1(37.9,13)
  Bottom Layer w1: v1(2.9,31.3) 3.464,30.736 4.662,30.736 power.1@4.662,27.578
  other v1: 18.9,30.75 20.6,30.75 18.9,32.45 20.6,32.45
led1: led2.1@24.364,9.763 u2.1@18.325,13.885 | length 11.7
  Top Layer w0.2: u2.1@18.4,13.9 19.616,13.9 19.616,12.555 19.616,10.361 19.45,10.194 19.45,10.111 19.45,9.123 19.591,8.981 19.602,8.981 19.984,8.6 v1(20.2,8.6)
  Bottom Layer w0.2: v1(20.2,8.6) 21.114,8.6 21.452,8.938 23.493,8.938 23.864,9.31 23.864,9.313 24.314,9.763 led2.1@24.364,9.763
led1r: led2.1@24.364,8.063 r14.1@26.569,8 | length 2.3
  Bottom Layer w0.2: led2.1@24.364,8.063 24.464,7.963 26.532,7.963 r14.1@26.569,8
led2: led1.1@22.117,9.8 u2.1@18.325,14.385 | length 8.2
  Top Layer w0.2: u2.1@18.325,14.385 19.981,14.385 19.981,10.019 v1(20.2,9.8)
  Bottom Layer w0.2: v1(20.2,9.8) led1.1@22.117,9.8
led2r: led1.1@22.117,8.1 r15.1@28.773,7.963 | length 7.4
  Bottom Layer w0.2: led1.1@22.117,8.1 22.167,8.1 23.104,7.163 27.973,7.163 28.273,7.463 28.273,7.513 28.723,7.963 r15.1@28.773,7.963
led3r: pwr.1@33.555,29.136 r18.1@33.555,29.136 | length 5.9
  Top Layer w0.2: v1(31.7,30.7) 31.7,29.9 32.464,29.136 pwr.1@33.555,29.136
  Bottom Layer w0.2: v1(31.7,30.7) 31.7,29.9 32.464,29.136 r18.1@33.555,29.136
led4: led4.1@35.237,26.736 u2.1@6.975,12.385 | length 76.2
  Top Layer w0.2: u2.1@6.975,12.385 7.917,12.385 7.917,11.983 8.496,11.404 v1(9.481,11.404) ; led4.1@35.237,26.736 36.464,26.736 v1(37.1,26.1)
  Bottom Layer w0.2: v1(9.481,11.404) 10.192,10.692 10.192,10.16 10.705,9.648 16.208,9.648 17.801,8.055 17.801,4.399 18.454,3.746 18.454,3.689 18.894,3.25 20.322,1.822 24.322,1.822 24.636,2.136 24.665,2.136 26.122,3.593 28.595,3.593 28.8,3.388 28.8,2.6 29.264,2.136 29.8,1.6 33.79,1.6 34,1.81 34,6.6 35.37,7.97 41.75,7.97 41.75,17.9 35.75,17.9 35.75,22.65 36.3,23.2 36.3,25.3 v1(37.1,26.1)
led4r: led4.1@33.537,26.736 r19.1@33.498,26.737 | length 6.1
  Top Layer w0.2: v1(31.7,28.1) 31.7,27 31.964,26.736 led4.1@33.537,26.736
  Bottom Layer w0.2: v1(31.7,28.1) 31.7,27 31.963,26.737 r19.1@33.498,26.737
led5: led5.1@35.237,24.436 u2.1@13.9,9.95 | length 66.8
  Top Layer w0.2: v1(13.677,8.317) 13.547,8.447 13.9,8.8 u2.1@13.9,9.95 ; led5.1@35.237,24.436 36.936,24.436 v1(37.1,24.6)
  Bottom Layer w0.2: v1(13.677,8.317) 14.633,9.272 15.328,9.272 16,8.6 16,6.756 16.301,6.455 17.451,6.455 17.451,4.198 18.104,3.544 20.177,1.472 24.496,1.472 26.267,3.243 28.45,3.243 28.45,2.455 29.197,1.708 29.505,1.4 29.655,1.25 33.935,1.25 34.085,1.4 34.35,1.665 34.35,6.455 35.515,7.62 41.895,7.62 42.1,7.825 42.1,19.29 40.79,20.6 37.1,20.6 v1(37.1,24.6)
led5r: led5.1@33.537,24.436 r20.1@33.498,24.437 | length 4.8
  Top Layer w0.2: v1(31.9,25.5) 31.9,25.1 32.7,24.3 33.401,24.3 led5.1@33.537,24.436
  Bottom Layer w0.2: v1(31.9,25.5) 31.9,25.1 32.7,24.3 33.361,24.3 r20.1@33.498,24.437
miso: r13.1@24.8,19.8 u2.1@11.4,9.95 u5.1@31.74,19.7 u7.1@23.2,20.8 | length 57.6
  Top Layer w0.2: u2.1@11.4,9.95 11.475,10.025 11.475,11.249 11.876,11.65 13.229,11.65 13.245,11.65 13.55,11.955 13.55,11.971 14.179,12.6 16.1,12.6 18.1,10.6 v1(18.397,10.6) ; v1(28,20.4) 28.233,20.633 28.233,21.172 28.391,21.33 31.74,21.33 ; u5.1@31.74,19.7 31.74,21.33 ; v1(33.849,8.398) 34.06,8.609 34.06,13.07 34.06,21.33 31.74,21.33
  Bottom Layer w0.2: v1(18.397,10.6) 18.497,10.7 18.797,11 25.126,11 25.263,10.863 28.963,10.863 29.9,11.8 33.8,11.8 34.06,11.54 34.06,8.66 33.823,8.423 v1(33.849,8.398) ; u7.1@23.2,20.8 24.4,20.8 24.6,20.6 24.6,20 24.8,19.8 24.8,19.75 25.6,18.95 27.154,18.95 27.847,19.643 27.847,20.247 v1(28,20.4)
miso2: u2.1@6.975,14.885 u3.4@17.3,32.85 | length 34.1
  Top Layer w0.2: u2.1@6.975,14.885 7.05,14.81 7.667,14.81 7.754,14.81 8.25,14.314 8.25,13.75 8.25,13.627 8.682,13.195 9.397,13.195 9.792,12.8 v1(9.792,12.68) ; v1(15.3,35.4) 15.516,35.4 15.762,35.154 15.785,35.154 16.7,34.239 16.7,32.984 16.817,32.866 17.284,32.866 u3.4@17.3,32.85
  Bottom Layer w0.2: v1(9.792,12.68) 10.056,12.944 10.047,12.953 10.047,13.342 10.35,13.645 10.35,15.888 12.1,17.638 12.1,18.133 12.1,22.143 15,25.043 15,29.017 16.4,30.417 16.4,34.539 15.785,35.154 15.762,35.154 15.516,35.4 v1(15.3,35.4)
mosi: r17.1@30.977,10.863 u2.1@11.9,9.95 u5.1@29.2,11.8 u7.1@22.55,20.95 | length 58.8
  Top Layer w0.2: u2.1@11.9,9.95 11.975,10.025 11.975,11.254 12.021,11.3 13.095,11.3 13.4,11.3 14.35,12.25 15.955,12.25 16.2,12.005 16.2,11.6 v1(16.12,11.52) ; u5.1@29.2,11.8 29.2,10.95 29.837,10.313 29.85,10.3 32,10.3 v1(32.7,9.6)
  Bottom Layer w0.2: u7.1@22.55,20.95 22.55,21.551 21.701,22.4 18.456,22.4 18.038,22.818 13.765,22.818 12.8,21.853 12.8,17.348 11.05,15.598 11.05,13.355 10.892,13.197 10.892,12.72 10.892,11.755 11.097,11.55 13.345,11.55 13.55,11.755 13.55,12.062 13.924,12.436 15.364,12.436 16.2,11.6 v1(16.12,11.52) 16.2,11.52 16.58,11.52 17.4,10.7 17.4,10.4 18,9.8 18.657,9.8 18.707,9.85 19.147,10.289 19.507,10.65 24.981,10.65 25.118,10.513 30.627,10.513 30.977,10.863 31.027,10.863 32.041,9.85 32.7,9.85 v1(32.7,9.6)
mosi2: u2.1@6.975,14.385 u3.4@17.3,31.85 | length 29.2
  Top Layer w0.2: u2.1@6.975,14.385 7.05,14.31 7.754,14.31 7.9,14.164 7.9,13.212 v1(8.667,12.445) ; v1(15.6,32.7) 16.45,31.85 u3.4@17.3,31.85
  Bottom Layer w0.2: v1(8.667,12.445) 8.667,12.677 8.423,12.677 8.423,13.361 8.429,13.367 9.489,13.367 9.929,13.806 10,13.877 10,16.033 11.75,17.783 11.75,18.278 11.75,22.288 14.65,25.188 14.65,29.162 15.6,30.112 v1(15.6,32.7)
nrst: c5.1@2.336,5.437 pad.1@2.35,12.55 r11.1@2.336,7.087 u2.1@6.975,16.385 | length 22.2
  Top Layer w0.2: pad.1@2.35,12.55 pad.1@2.068,12.55 ; v1@3.8,8.708 3.8,6.851 2.386,5.437 2.336,5.437 1.886,5.887 1.717,5.887 1.1,6.504 1.1,11.3 2.068,12.268 pad.1@2.068,12.55 ; u2.1@6.975,16.385 6.9,16.31 6.225,16.31 6.196,16.31 6.05,16.164 6.05,14.576 5.653,14.179 5.507,14.032 4.248,14.032 3.898,13.682 2.662,13.682 2.068,13.088 pad.1@2.068,12.55
  Bottom Layer w0.2: r11.1@2.336,7.087 2.386,7.087 3.8,8.501 v1(3.8,8.6)
osc_in: c4.1@4.896,18.629 cr1.3@4.703,16.582 u2.1@6.975,17.385 | length 5.3
  Top Layer w0.2: c4.1@4.896,18.629 4.85,18.629 4.4,18.179 4.4,16.885 4.703,16.582 4.999,16.878 4.999,17.291 5.092,17.385 u2.1@6.975,17.385
osc_out: c3.1@2.691,18.629 cr1.3@2.503,14.882 u2.1@6.975,16.885 | length 9.2
  Top Layer w0.2: cr1.3@2.503,14.882 2.603,14.882 3.601,15.88 3.751,15.88 ; c3.1@2.691,18.629 2.598,18.537 2.598,17.779 2.827,17.551 3.188,17.551 3.603,17.136 3.603,16.029 3.751,15.88 ; u2.1@6.975,16.885 6.9,16.81 6.283,16.81 6.196,16.81 5.7,16.314 5.7,15.884 5.548,15.732 5.507,15.732 3.899,15.732 3.751,15.88
pa1: 
pa4: i2c.1@36.02,11.321 u2.1@10.4,9.95 | length 53.4
  Top Layer w0.2: u2.1@10.408,10.008 10.475,10.075 10.475,11.375 11.3,12.2 11.85,12.75 v1(11.992,12.75)
  Bottom Layer w0.2: v1(11.992,12.75) 12.2,12.958 12.324,12.958 12.985,13.618 12.985,13.742 12.985,14.441 12.62,14.806 12.62,15.683 13.537,16.6 14.512,16.6 14.687,16.6 15.073,16.213 16.08,16.213 16.08,15.441 16.05,15.411 16.05,14.789 16.08,14.759 16.08,14.63 17.944,12.766 24.976,12.766 26.16,13.95 27.682,13.95 28.209,14.477 28.209,14.697 28.2,14.707 28.2,18.324 30.012,20.136 34.41,20.136 34.41,17.388 35.398,16.4 37.295,16.4 40.1,13.595 40.1,11.45 36.149,11.45 i2c.1@36.02,11.321
pa15: spi3.1@36.02,13.32 u2.1@15.9,21.3 | length 36.7
  Top Layer w0.2: u2.1@15.9,21.3 15.975,21.375 15.975,22.079 16.65,22.754 16.65,25.654 16.833,25.837 20.437,25.837 21.35,26.75 28.957,26.75 29.838,25.869 29.838,23.723 29.95,23.611 29.95,22.611 30.14,22.421 30.53,22.03 34.35,22.03 34.76,21.62 34.76,13.36 34.8,13.32 spi3.1@36.02,13.32
pb0: u2.1@13.4,9.95 | length 3.2
  Top Layer w0.2: v1(12.65,7.8) 12.1,7.8 13.4,9.1 u2.1@13.4,9.95
pb1: 
pb2: 
pb15: u2.1@18.325,13.385 u3.4@17.3,30.85 | length 34.8
  Top Layer w0.2: v1(10.2,18.3) 10.2,17.226 12.985,14.441 12.985,14.076 13.676,13.385 14.111,12.95 16.195,12.95 16.63,13.385 17.1,13.385 u2.1@18.325,13.385 ; v1(13.8,34.1) 13.927,34.1 14.5,33.527 14.5,32.244 15.144,31.6 15.7,31.6 16.45,30.85 u3.4@17.3,30.85
  Bottom Layer w0.2: v1(10.2,18.3) 10.234,18.3 10.7,18.766 10.7,22.723 13.6,25.623 13.6,30.761 14.45,31.611 14.45,33.477 13.827,34.1 v1(13.8,34.1)
pc8: u2.1@18.325,14.885
pc9: u2.1@18.325,15.385
pc10: spi3.1@36.02,12.32 u2.1@15.4,21.3 | length 43.2
  Top Layer w0.2: u2.1@15.4,21.3 15.475,21.375 15.475,22.079 15.621,22.225 15.626,22.225 16.3,22.899 16.3,25.799 16.688,26.187 20.292,26.187 21.205,27.1 29.102,27.1 29.838,26.364 30.188,26.014 30.188,23.868 30.3,23.756 30.3,22.756 30.675,22.38 33.505,22.38 33.92,22.38 34.495,22.38 35.27,21.605 35.27,16 37.66,16 38.7,14.96 38.7,12.7 38.174,12.174 36.166,12.174 spi3.1@36.02,12.32
qmc_c1: c20.1@19.2,25.5 u6.1@22.68,24.68 | length 3.8
  Bottom Layer w0.2: c20.1@19.2,25.5 19.25,25.5 20.07,24.68 u6.1@22.68,24.68
qmc_setc: c19.1@16.91,26.15 u6.1@22.68,25.68 | length 7
  Bottom Layer w0.2: c19.1@16.91,26.15 17.06,26.3 19.904,26.3 20.05,26.154 20.05,25.463 20.483,25.03 21.862,25.03 22.387,25.555 22.391,25.555 22.491,25.655 22.655,25.655 u6.1@22.68,25.68
qmc_setp: c19.1@16.91,24.45 u6.1@23.2,23.66 | length 7.8
  Bottom Layer w0.2: c19.1@16.91,24.45 16.96,24.45 18.26,23.15 18.346,23.15 18.496,23 21.039,23 21.289,22.75 22.967,22.75 23.2,22.983 u6.1@23.2,23.66
res12k: r1.1@11.994,35.15 u3.4@22.2,32.85 | length 17.5
  Top Layer w0.2: r1.1@11.994,35.15 12.378,35.534 12.378,35.883 12.998,36.503 17.515,36.503 17.8,36.218 v1(17.8,35.4) ; u3.4@22.2,32.85 22.75,32.85 v1(24,34.1)
  Bottom Layer w0.2: v1(17.8,35.4) 18.016,35.4 18.466,34.95 19.285,34.95 20.085,35.75 22.211,35.75 22.85,35.111 22.85,34.716 23.367,34.199 23.901,34.199 v1(24,34.1)
rx1: r3.1@14.514,27.355 u2.1@11.4,21.3 | length 8.4
  Top Layer w0.2: u2.1@11.4,21.21 11.4,21.3 11.475,21.375 11.475,21.992 11.475,22.079 12.046,22.65 12.844,22.65 13.225,23.031 13.225,26.914 13.666,27.355 r3.1@14.514,27.355
rx2: pad.1@14.32,37.8 u2.1@8.9,9.95 | length 36.7
  Top Layer w0.2: v1(8.9,8.4) u2.1@8.9,10.2
  Bottom Layer w0.2: v1(8.9,8.4) 8.9,9.6 7.25,11.25 7.25,22.491 8.15,23.391 8.959,24.2 9.049,24.2 10.197,24.2 12.2,26.203 12.2,36.2 13.341,37.341 13.374,37.341 13.833,37.8 pad.1@14.144,37.8 ; pad.1@14.3,38.6 14.144,38.444 pad.1@14.144,37.8 ; pad.1@14.32,37.8 pad.1@14.144,37.8
rx3: u2.1@15.4,9.95 uart.1@12.8,5.692 | length 6.6
  Top Layer w0.2: v1(15.233,8.273) 15.203,8.303 15.4,8.5 u2.1@15.4,9.95
  Bottom Layer w0.2: uart.1@12.8,5.692 12.8,6.142 13.35,6.692 15.142,6.692 15.3,6.85 15.3,8 15.13,8.17 v1(15.233,8.273)
rx4: pad.1@25.37,37.8 u2.1@14.9,21.3 | length 54.6
  Top Layer w0.2: v1(8,21.4) 8,19.856 8.806,19.05 10.511,19.05 10.95,18.611 10.95,16.971 12.62,15.301 13.335,14.586 13.335,14.221 14.256,13.3 16.05,13.3 16.05,14.789 16.05,15.411 16.45,15.811 16.45,19.883 16.019,20.313 14.9,20.313 u2.1@14.9,21.3
  Bottom Layer w0.2: v1(8,21.4) 8,21.531 8.5,22.031 8.5,22.886 8.5,23.246 9.104,23.85 9.464,23.85 10.342,23.85 12.55,26.058 12.55,36.055 12.998,36.503 24.994,36.503 25.111,36.62 pad.1@25.111,38.171
rx5: pad.1@39.54,19.2 u2.1@13.9,21.3 | length 36.4
  Top Layer w0.2: u2.1@13.9,21.6 13.975,21.675 13.975,21.992 13.975,22.079 14.471,22.575 14.975,22.575 15.6,23.2 15.6,26.088 16.398,26.887 20.002,26.887 20.915,27.8 29.392,27.8 30.538,26.654 30.888,26.304 30.888,24.158 31,24.046 31,23.08 34.785,23.08 35.97,21.895 35.97,21.23 36.75,20.45 39.057,20.45 39.6,19.907 pad.1@39.54,19.2
sck: r8.1@24.7,22.004 u2.1@10.9,9.95 u5.1@30.47,11.8 u7.1@22.05,20.95 | length 71
  Top Layer w0.2: u2.1@10.903,10.403 10.903,11.172 11.731,12 13.1,12 13.2,12.1 13.2,12.786 v1(13.214,12.786) ; r8.1@24.7,22.004 24.7,21.954 25.15,21.504 25.2,21.504 25.6,21.104 25.6,19.196 26.264,18.533 27.809,18.533 27.809,13.31 30.41,13.31 ; u5.1@30.47,11.8 u5.1@30.47,12.426 ; u5.1@30.672,12.628 u5.1@30.47,12.426 ; v1(31.4,13.9) 31.06,13.9 30.47,13.31 u5.1@30.47,12.426
  Bottom Layer w0.2: u7.1@22.055,20.95 22.025,20.98 22.025,21.581 21.606,22 18.361,22 18.111,22.25 17.893,22.468 13.91,22.468 13.15,21.708 13.15,17.203 11.4,15.453 11.4,13.232 11.4,13.21 11.242,13.052 11.242,12.439 11.242,11.9 13.2,11.9 13.2,12.5 13.2,12.786 v1(13.214,12.786) 15.944,12.786 17.38,11.35 17.67,11.35 25.271,11.35 25.408,11.213 28.818,11.213 29.755,12.15 33.75,12.15 33.75,14.635 33.12,14.635 33.111,14.645 32.343,14.645 31.599,13.9 v1(31.4,13.9)
sck2: u2.1@18.325,12.385 u3.4@17.3,33.35 | length 45.1
  Top Layer w0.2: v1(16.6,35.4) 16.6,35.184 17.05,34.734 17.05,33.375 17.075,33.35 u3.4@17.3,33.35 ; u2.1@18.325,12.385 18.35,12.41 19.266,12.41 19.266,10.506 19.1,10.339 19.1,8.978 18.551,8.429 v1(18.551,7.9)
  Bottom Layer w0.2: v1(16.6,35.4) 16.753,35.247 16.753,34.93 16.8,34.883 16.8,30.139 16.611,29.95 15.367,28.707 15.35,28.689 15.35,24.898 12.45,21.998 12.45,17.988 12.45,17.493 10.7,15.743 10.7,13.5 10.542,13.342 10.542,10.305 10.85,9.998 16.202,9.998 16.353,9.998 18.151,8.2 18.151,8.049 18.3,7.9 v1(18.551,7.9)
scl: i2c.1@36.02,12.321 r9.1@24.8,19.8 u2.1@10.4,21.3 u6.1@25.22,25.68 u8.1@25.81,15 | length 73.8
  Top Layer w0.2: u2.1@10.4,21.31 10.4,21.3 10.475,21.225 10.475,20.521 12.483,18.513 v1(14.25,18.513) ; r9.1@24.8,19.8 24.8,19.501 26.119,18.183 26.401,17.901 v1@26.7,17.901 ; v1@26.7,17.9 27,17.9 v1(27,17.783) ; v1(29.4,22.1) 29.4,21.84 29.559,21.68 34.205,21.68 34.41,21.475 34.41,9.2 v1(37.6,9.2)
  Bottom Layer w0.2: v1(14.25,18.513) 14.491,18.754 15.05,18.195 15.31,17.936 15.31,16.967 15.363,16.913 17.495,16.913 17.9,16.508 17.9,14.295 17.995,14.2 21.8,14.2 21.8,16.723 22.15,17.073 22.15,17.755 22.917,18.522 27,18.522 ; u6.1@25.22,25.68 25.275,25.68 25.28,25.675 26.344,25.675 26.461,25.558 26.461,24.517 26.579,24.4 28.183,24.4 28.35,24.233 28.35,22.511 28.612,22.249 29.251,22.249 v1(29.4,22.1) 29.247,21.947 28.913,21.947 28.75,21.784 28.75,20.051 27.221,18.522 27,18.522 ; u8.1@25.81,15 25.828,14.982 25.869,14.982 27.236,14.982 27.236,17.547 v1(27,17.783) 27,18.522 ; i2c.1@36.02,12.321 35.019,12.321 35.019,9.2 v1(37.6,9.2)
sda: i2c.1@36.02,10.321 r7.1@27.5,25.859 u2.1@9.9,21.3 u6.1@24.7,26.2 u8.1@25.16,15 | length 68.1
  Top Layer w0.2: u2.1@9.9,21.3 9.937,21.263 9.937,20.463 13.037,17.363 v1(14.25,17.363) ; r7.1@27.5,25.859 27.55,25.859 28,25.409 28,25.2 29.2,24 v1(29.2,23.3)
  Bottom Layer w0.2: v1(14.25,17.363) 14.418,17.363 15.218,16.563 17.35,16.563 17.55,16.363 17.55,14.15 17.85,13.85 22.05,13.85 22.1,13.9 22.1,13.911 22.539,14.35 22.55,14.35 23.211,14.35 23.24,14.379 25.219,14.379 27.617,14.379 27.75,14.513 27.75,18.519 29.717,20.486 30.14,20.486 ; u6.1@24.7,26.2 24.86,26.36 25.345,26.36 25.655,26.05 29.838,26.05 29.838,25.248 29.838,23.935 v1@29.203,23.3 ; 25.16,14.379 u8.1@25.16,15 ; v1(29.2,23.3) v1@29.203,23.3 ; i2c.1@36.02,10.321 37.051,10.321 37.051,11.1 40.245,11.1 40.45,11.305 40.45,13.74 37.44,16.75 35.543,16.75 34.76,17.533 34.76,20.281 34.555,20.486 30.14,20.486 ; v1@29.203,23.3 29.261,23.3 30.15,22.411 30.15,21.789 30.14,21.779 30.14,20.486
tx1: r4.1@14.179,23.537 u2.1@11.9,21.3 | length 3.7
  Top Layer w0.2: u2.1@11.9,21.31 11.975,21.385 11.975,22.079 12.196,22.3 12.988,22.3 13.575,22.886 13.575,22.982 14.129,23.537 r4.1@14.179,23.537
tx2: pad.1@11.78,37.8 u2.1@6.975,11.885 | length 31.9
  Top Layer w0.2: v1(6.6,10.8) 6.6,11.016 6.975,11.391 u2.1@6.975,11.885
  Bottom Layer w0.2: v1(6.6,10.8) 6.6,11.016 6.9,11.316 6.9,22.551 6.9,22.636 8.814,24.55 8.899,24.55 10.052,24.55 11.85,26.348 11.85,37.73 pad.1@11.78,37.8 ; pad.1@11.76,38.6 11.76,38.173 pad.1@12,37.933
tx3: u2.1@14.9,9.95 uart.1@11.8,5.692 | length 6.8
  Top Layer w0.2: v1(14.432,7.449) 14.432,7.5 14.432,8.532 14.6,8.7 14.9,9 u2.1@14.9,9.95
  Bottom Layer w0.2: uart.1@11.8,5.692 11.8,6.633 12.21,7.042 14.342,7.042 14.342,7.449 v1(14.432,7.449)
tx4: pad.1@22.83,37.8 u2.1@6.975,12.885 | length 44.7
  Top Layer w0.2: v1(5.3,12.3) 5.885,12.885 6.975,12.885 u2.1@7.05,12.81
  Bottom Layer w0.2: v1(5.3,12.3) 6.55,13.55 6.55,22.286 6.55,22.781 8.669,24.9 9.164,24.9 9.908,24.9 11,25.992 11,36.812 10.53,37.282 10.53,38.318 10.53,39.1 21.804,39.1 22.73,38.174 pad.1@22.73,38.119
tx5: pad.1@37,19.2 u2.1@14.4,21.3 | length 33.2
  Top Layer w0.2: u2.1@14.4,21.3 14.475,21.375 14.475,21.992 14.475,22.079 14.621,22.225 15.126,22.225 15.476,22.575 15.482,22.575 15.95,23.043 15.95,25.943 16.543,26.537 20.147,26.537 21.06,27.45 29.247,27.45 30.188,26.509 30.538,26.159 30.538,24.013 30.65,23.901 30.65,22.901 30.82,22.73 34.64,22.73 35.202,22.168 35.62,21.75 35.62,20.58 pad.1@37,19.2
v2: 
v2_1: r5.1@11.649,4.222 r6.1@21.449,1.536 r10.1@23.568,1.536 | length 14.9
  Top Layer w0.2: r5.1@11.649,4.222 11.699,4.222 12.149,3.772 12.149,2.996 14.459,0.686 20.649,0.686 21.449,1.486 21.449,1.536 21.585,1.4 r10.1@23.432,1.4 ; r10.1@23.432,1.4 r10.1@23.568,1.536 ; r10.1@23.432,1.4 r10.1@23.568,1.536 ; r10.1@23.432,1.4 r10.1@23.568,1.536 ; r10.1@23.432,1.4 r10.1@23.568,1.536
v2_2: r5.1@11.649,5.922 u2.1@12.4,9.95 | length 4.5
  Top Layer w0.2: r5.1@11.649,5.922 11.4,6.171 11.4,8 11.4,8.106 11.994,8.7 12.194,8.9 12.4,9.106 u2.1@12.4,9.95
vbat: c2.1@7.863,22.964 u2.1@6.975,19.385 | length 5.3
  Top Layer w0.2: u2.1@6.975,19.385 6.117,19.385 6,19.502 6,21.151 6.657,21.808 6.707,21.808 7.363,22.464 7.413,22.464 7.863,22.914 c2.1@7.863,22.964
vcap1: c8.1@15.35,5.5 u2.1@15.9,9.95 | length 4.9
  Top Layer w0.2: c8.1@15.35,5.5 15.4,5.5 16.1,6.2 16.1,8.5 15.9,8.7 u2.1@15.9,9.95
vcap2: c11.1@20,22.6 u2.1@18.325,18.885 | length 5.4
  Top Layer w0.2: u2.1@18.325,18.885 18.4,18.96 19.104,18.96 19.25,19.106 19.25,19.809 18.55,20.509 18.55,21.211 19.489,22.15 19.55,22.15 c11.1@20,22.6
vcc: c1.1@1.7,28 c6.1@7.2,9.2 c7.1@11.975,25.809 c9.1@17.554,5.463 c10.1@17.796,23.337 c14.1@22.551,12.05 c15.1@26.436,13.663 c18.1@5.5,9.2 c21.1@16.227,17.763 c22.1@18.431,17.598 c23.1@21,15.4 c24.1@27,32.3 c25.1@27.261,30.08 c26.1@27.261,27.876 c27.1@27.5,23.5 c28.1@31.4,15.7 i2c.1@36.02,14.321 pad.1@1.5,22.6 pad.1@16.86,37.8 pad.1@32.72,3.06 pwr.1@35.255,29.136 r7.1@27.5,24.159 r8.1@26.4,22.004 r9.1@26.5,19.8 r11.1@2.336,5.387 r12.1@16.263,21.618 r13.1@26.5,19.8 r16.1@30.863,18.936 r17.1@30.977,9.163 spi3.1@36.02,15.32 u1.1@3.731,27.615 u2.1@6.975,13.385 u2.1@8.9,21.3 u2.1@9.9,9.95 u2.1@16.4,9.95 u2.1@18.325,19.385 u3.4@17.3,32.35 u3.4@18,29.15 u3.4@18.5,34.05 u3.4@20,34.05 u3.4@20.5,34.05 u3.4@21.5,34.05 u3.4@22.2,31.85 u3.4@22.2,32.35 u5.1@31.74,11.8 u5.1@33.01,11.8 u6.1@23.2,26.2 u6.1@25.22,24.18 u6.1@25.22,25.18 u7.1@20.9,19.3 u7.1@22.55,19.15 u8.1@23.86,16.45 u8.1@25.16,16.45 uart.1@13.8,5.692 | length 155.5
  Top Layer w0.2: u2.1@6.975,13.385 6.9,13.31 6.283,13.31 5.022,13.31 4.4,12.688 4.4,10.228 4.578,10.05 6.4,10.05 7.2,9.25 c6.1@7.2,9.2 ; v1(9.2,19.8) 9.2,20.016 8.9,20.316 8.9,21.3 8.85,21.35 8.85,23.236 9.114,23.5 9.616,23.5 11.925,25.809 c7.1@11.975,25.809 ; u2.1@9.9,9.95 9.975,9.875 9.975,9.136 10.597,8.515 10.597,8.299 v1(10.597,7.888) ; v1(15.6,34) 16.35,33.25 16.35,32.467 16.467,32.35 u3.4@17.3,32.35 ; u2.1@16.4,9.95 16.45,9.9 16.45,8.055 v1@17.105,7.4 ; pad.1@16.86,37.8 17.3,37.8 18.55,36.55 19.883,36.55 20,36.433 20,34.6 19.95,34.65 18.642,34.65 18.525,34.533 18.525,34.075 u3.4@18.5,34.05 ; v1(16.9,7.4) v1@17.105,7.4 ; v1(17.3,28) 17.975,28.675 17.975,29.125 u3.4@18,29.15 ; c9.1@17.554,5.463 18,5.909 18,6.9 17.5,7.4 v1@17.105,7.4 ; v1@17.647,21.353 17.5,21.5 17.647,21.647 17.647,21.87 17.5,22.016 17.5,23.041 c10.1@17.796,23.337 ; v1(17.8,21.5) 17.953,21.347 17.953,20.997 17.967,20.983 17.967,19.46 18.042,19.385 u2.1@18.325,19.385 ; u3.4@20,34.05 u3.4@20,34.3 ; 20,34.58 u3.4@20,34.3 ; u3.4@20.5,34.05 20.5,34.275 20.475,34.3 u3.4@20,34.3 ; u3.4@21.5,34.05 21.5,34.275 21.747,34.522 21.747,34.847 v1(21.9,35) ; u3.4@22.2,31.85 22.2,32.35 23.134,32.35 23.484,32.7 v1(23.7,32.7) ; c14.1@22.551,12.05 22.099,12.503 22.099,13.309 22.1,13.311 22.1,15.8 22.55,16.25 v1(22.9,16.25) ; v1(24.117,17.772) 25.428,17.772 26.436,16.764 c15.1@26.436,13.663 ; r9.1@26.5,19.8 26.5,21.904 26.4,22.004 26.504,21.9 v1(27.9,21.9) 27.9,23.759 r7.1@27.5,24.159 ; u5.1@31.74,11.8 33.01,11.8 33.01,10.55 33.45,10.11 33.45,9.25 32.7,8.5 v1(32.7,8.45) ; pwr.1@35.255,29.136 35.391,29 v1(37,29) ; spi3.1@36.02,15.32 37.18,15.32 37.8,14.7 37.8,14.234 v1(37.834,14.234)
  Top Layer w1: v1(1.6,26.464) 1.6,27.95 1.65,28 1.7,28 1.75,28 2.122,27.628 3.718,27.628 u1.1@3.731,27.615
  Bottom Layer w0.2: r11.1@2.336,5.387 3.236,5.387 4.143,6.294 4.143,7.793 5.175,8.825 5.175,9.108 5.05,9.233 4.767,9.233 4.1,9.9 4.1,10.6 4.247,10.747 4.247,11.347 v1(4.4,11.5) ; c18.1@5.5,9.2 5.5,9.15 5.95,8.7 5.961,8.7 6.661,8 7.489,8 8.797,6.692 10.597,6.692 v1(10.597,7.888) ; v1(13.7,4.1) 13.7,5.592 uart.1@13.8,5.692 ; c21.1@16.227,17.763 18.266,17.763 18.431,17.598 17.869,17.035 18.25,16.653 18.25,14.55 20.597,14.55 c23.1@21.199,15.151 ; r12.1@16.263,21.618 16.263,21.629 16.713,22.079 17.221,22.079 v1(17.8,21.5) ; c22.1@18.484,17.6 20.184,19.3 u7.1@20.9,19.3 ; c23.1@21,15.4 21.242,15.642 v1@21.242,17.542 ; v1(21.4,17.384) v1@21.242,17.542 ; v1(21.516,25.8) 21.916,26.2 u6.1@23.2,26.2 ; v1(21.9,35) 21.999,34.901 21.999,34.368 23.017,33.35 26.201,33.35 26.45,33.101 26.45,32.75 26.55,32.75 c24.1@27,32.3 ; u7.1@22.55,19.15 22.55,18.65 21.6,17.7 21.4,17.7 v1@21.242,17.542 ; 22.95,33.417 22.95,29.284 23.134,29.1 26.352,29.1 27.261,28.191 c26.1@27.261,27.876 ; v1(23.7,32.7) 23.7,31.661 24.829,30.532 26.811,30.532 27.261,30.082 c25.1@27.261,30.08 ; u8.1@23.86,16.45 23.785,16.375 22.775,16.375 v1@22.725,16.425 ; v1(24.117,17.772) 24.117,17.8 24.5,17.8 24.5,17.5 25.16,16.84 u8.1@25.16,16.45 ; u6.1@25.22,24.18 26,24.18 ; u6.1@25.22,25.18 25.245,25.155 25.645,25.155 26,24.8 26,24.18 ; r13.1@26.5,19.8 26.5,23.68 ; v1(27.9,21.9) 27.9,22.116 27.5,22.516 27.5,23.5 27.32,23.68 26.5,23.68 ; r16.1@30.863,18.936 30.86,18.932 31.1,18.692 v1(31.1,17.4) ; r17.1@30.977,9.163 31.741,8.4 32.6,8.4 32.675,8.475 v1(32.7,8.45) ; c28.1@31.4,15.7 32.8,15.7 v1(33,15.5) ; i2c.1@36.422,14.298 37.702,14.298 37.8,14.2 v1(37.834,14.234) ; v1@22.725,16.425 v1(22.9,16.25) v1@22.725,16.425 ; 26,24.18 26.5,23.68
vesc: esc.1@20.204,5.7 pad.2@20.204,5.7 r6.1@19.749,1.536 | length 6.8
  Top Layer w0.2: r6.1@19.749,1.536 19.749,2.685 20.2,3.136 20.2,5.696 pad.2@20.204,5.7
  Bottom Layer w0.2: v1(20.2,3.2) esc.1@20.2,5.696
vin: c17.1@6.362,30.736 pad.3@5.41,25.4 power.1@5.31,26.36 u1.1@3.731,25.315 | length 14.6
  Top Layer w1: v2(2.8,23.9) 3.731,24.831 u1.1@3.731,25.315
  Bottom Layer w1: v2(2.8,23.9) 4.1,25.2 5,25.2 5.2,25.4 8,25.4 8,30.736 c17.1@6.362,30.736
xtal_in: c12.1@25.7,35.37 cr2.3@25.887,33.236 u3.4@22.2,31.35 | length 6.9
  Top Layer w0.2: u3.4@22.2,31.35 22.894,31.35 23.244,31.7 23.761,31.7 24.696,32.636 25.387,32.636 25.7,32.949 cr2.3@25.7,33.522 ; c12.1@25.7,35.37 cr2.3@25.7,33.522 ; cr2.3@25.887,33.236 25.887,33.336 cr2.3@25.7,33.522
xtal_out: c13.1@27.626,28.911 cr2.3@27.587,31.036 u3.4@22.2,30.85 | length 8.7
  Top Layer w0.2: u3.4@22.2,30.85 22.889,30.85 23.389,31.35 23.906,31.35 24.541,31.986 26.737,31.986 27.587,31.136 27.587,31.036 27.5,30.949 c13.1@27.5,29.037 ; c13.1@27.5,29.037 27.626,28.911 c13.1@27.5,29.037
pads on no net: ant.6@39.58,21.75 esc.1@26.204,5.7 esc.5 i2c.1@36.02,15.321 i2c.5 power.5 spi3.5 u1.1@9.931,27.615 u2.1@14.4,9.95 u2.1@18.325,11.885 u2.1@18.325,12.885 u2.1@18.325,17.885 u3.4@18.5,29.15 u3.4@19,29.15 u3.4@19,34.05 u3.4@19.5,29.15 u3.4@19.5,34.05 u3.4@20,29.15 u3.4@20.5,29.15 u3.4@21,29.15 u3.4@21.5,29.15 u6.1@23.7,23.66 u6.1@23.7,26.2 u6.1@24.2,23.66 u6.1@24.2,26.2 u6.1@24.7,23.66 u6.1@25.22,24.68 u7.1@20.9,19.8 u7.1@20.9,20.3 u7.1@23.2,19.3 u7.1@23.2,19.8 u7.1@23.2,20.3 u8.1@24.51,15 u8.1@25.81,16.45 uart.5

## Polygon pours and split planes (outlines as drawn)
gnd on Mid-Layer 1 "GND_L02_P003" (solid, pour order 3): 9.5,40.1 9.5,32.5 0,32.5 0,7.3 0,7.5 9.6,7.5 9.6,0 34.3,0 34.3,7.7 43,7.7 43,20.9 37.8,20.9 37.8,32.17 34.4,32.17 34.4,40.1
vcc on Mid-Layer 2 "VCC_L03_P004" (solid, pour order 4): 0,7.5 9.6,7.5 9.6,0 34.3,0 34.3,7.7 43,7.7 43,20.9 37.8,20.9 37.8,32.17 34.4,32.17 34.4,40.1 9.5,40.1 9.5,32.5 0,32.5

## Silkscreen, mask and mechanical layers (free items; w line width, h text height)
Bottom Overlay:
  text "tx" at 12.8,36.01 h1
  text "rx" at 15.1,36 h1
  text "g" at 20.2,35.933 h1
  text "v" at 17.4,35.9 h1
  text "rx" at 25.3,35.8 h1
  text "tx" at 23.233,35.752 h1
  text "etx" at 28.5,35.7 h1
  text "erx" at 31.6,35.7 h1
  text "-" at 8.2,27.8 h1
  text "+" at 8.1,24.933 h1
  text "boot" at 4.6,20.2 h1
  text "rx" at 42,18.9 h1
  text "tx" at 35.6,18.8 h1
  text "reset" at 4.777,14.132 h1
  text "dio" at 31.7,6.8 h1
  text "clk" at 33.8,6.8 h1
  text "vcc" at 34.2,1.167 h1
  text "gnd" at 31.4,1.133 h1
Mechanical 13:
  lines w0.1: 0,4.531 4.531,0 37.699,0 43,5.301 43,12.85 43,27.95 43,34.8 37.7,40.1 5.8,40.1 0,34.3 0,4.531